# Altium PCB main.PcbDoc (part 1 of 2)
Units mm, origin at the board's own origin, x right, y up, seen from the top; angles counter-clockwise.
Board outline 50 x 70 mm, 6 copper layers (Layer 1 SIG, Layer 2 GND, Layer 3 SIG PWR, Layer 4 SIG PWR, Layer 5 GND, Layer 6 SIG), stack 1.546 mm thick; 153 components, 145 nets, 599 pads, 426 vias.
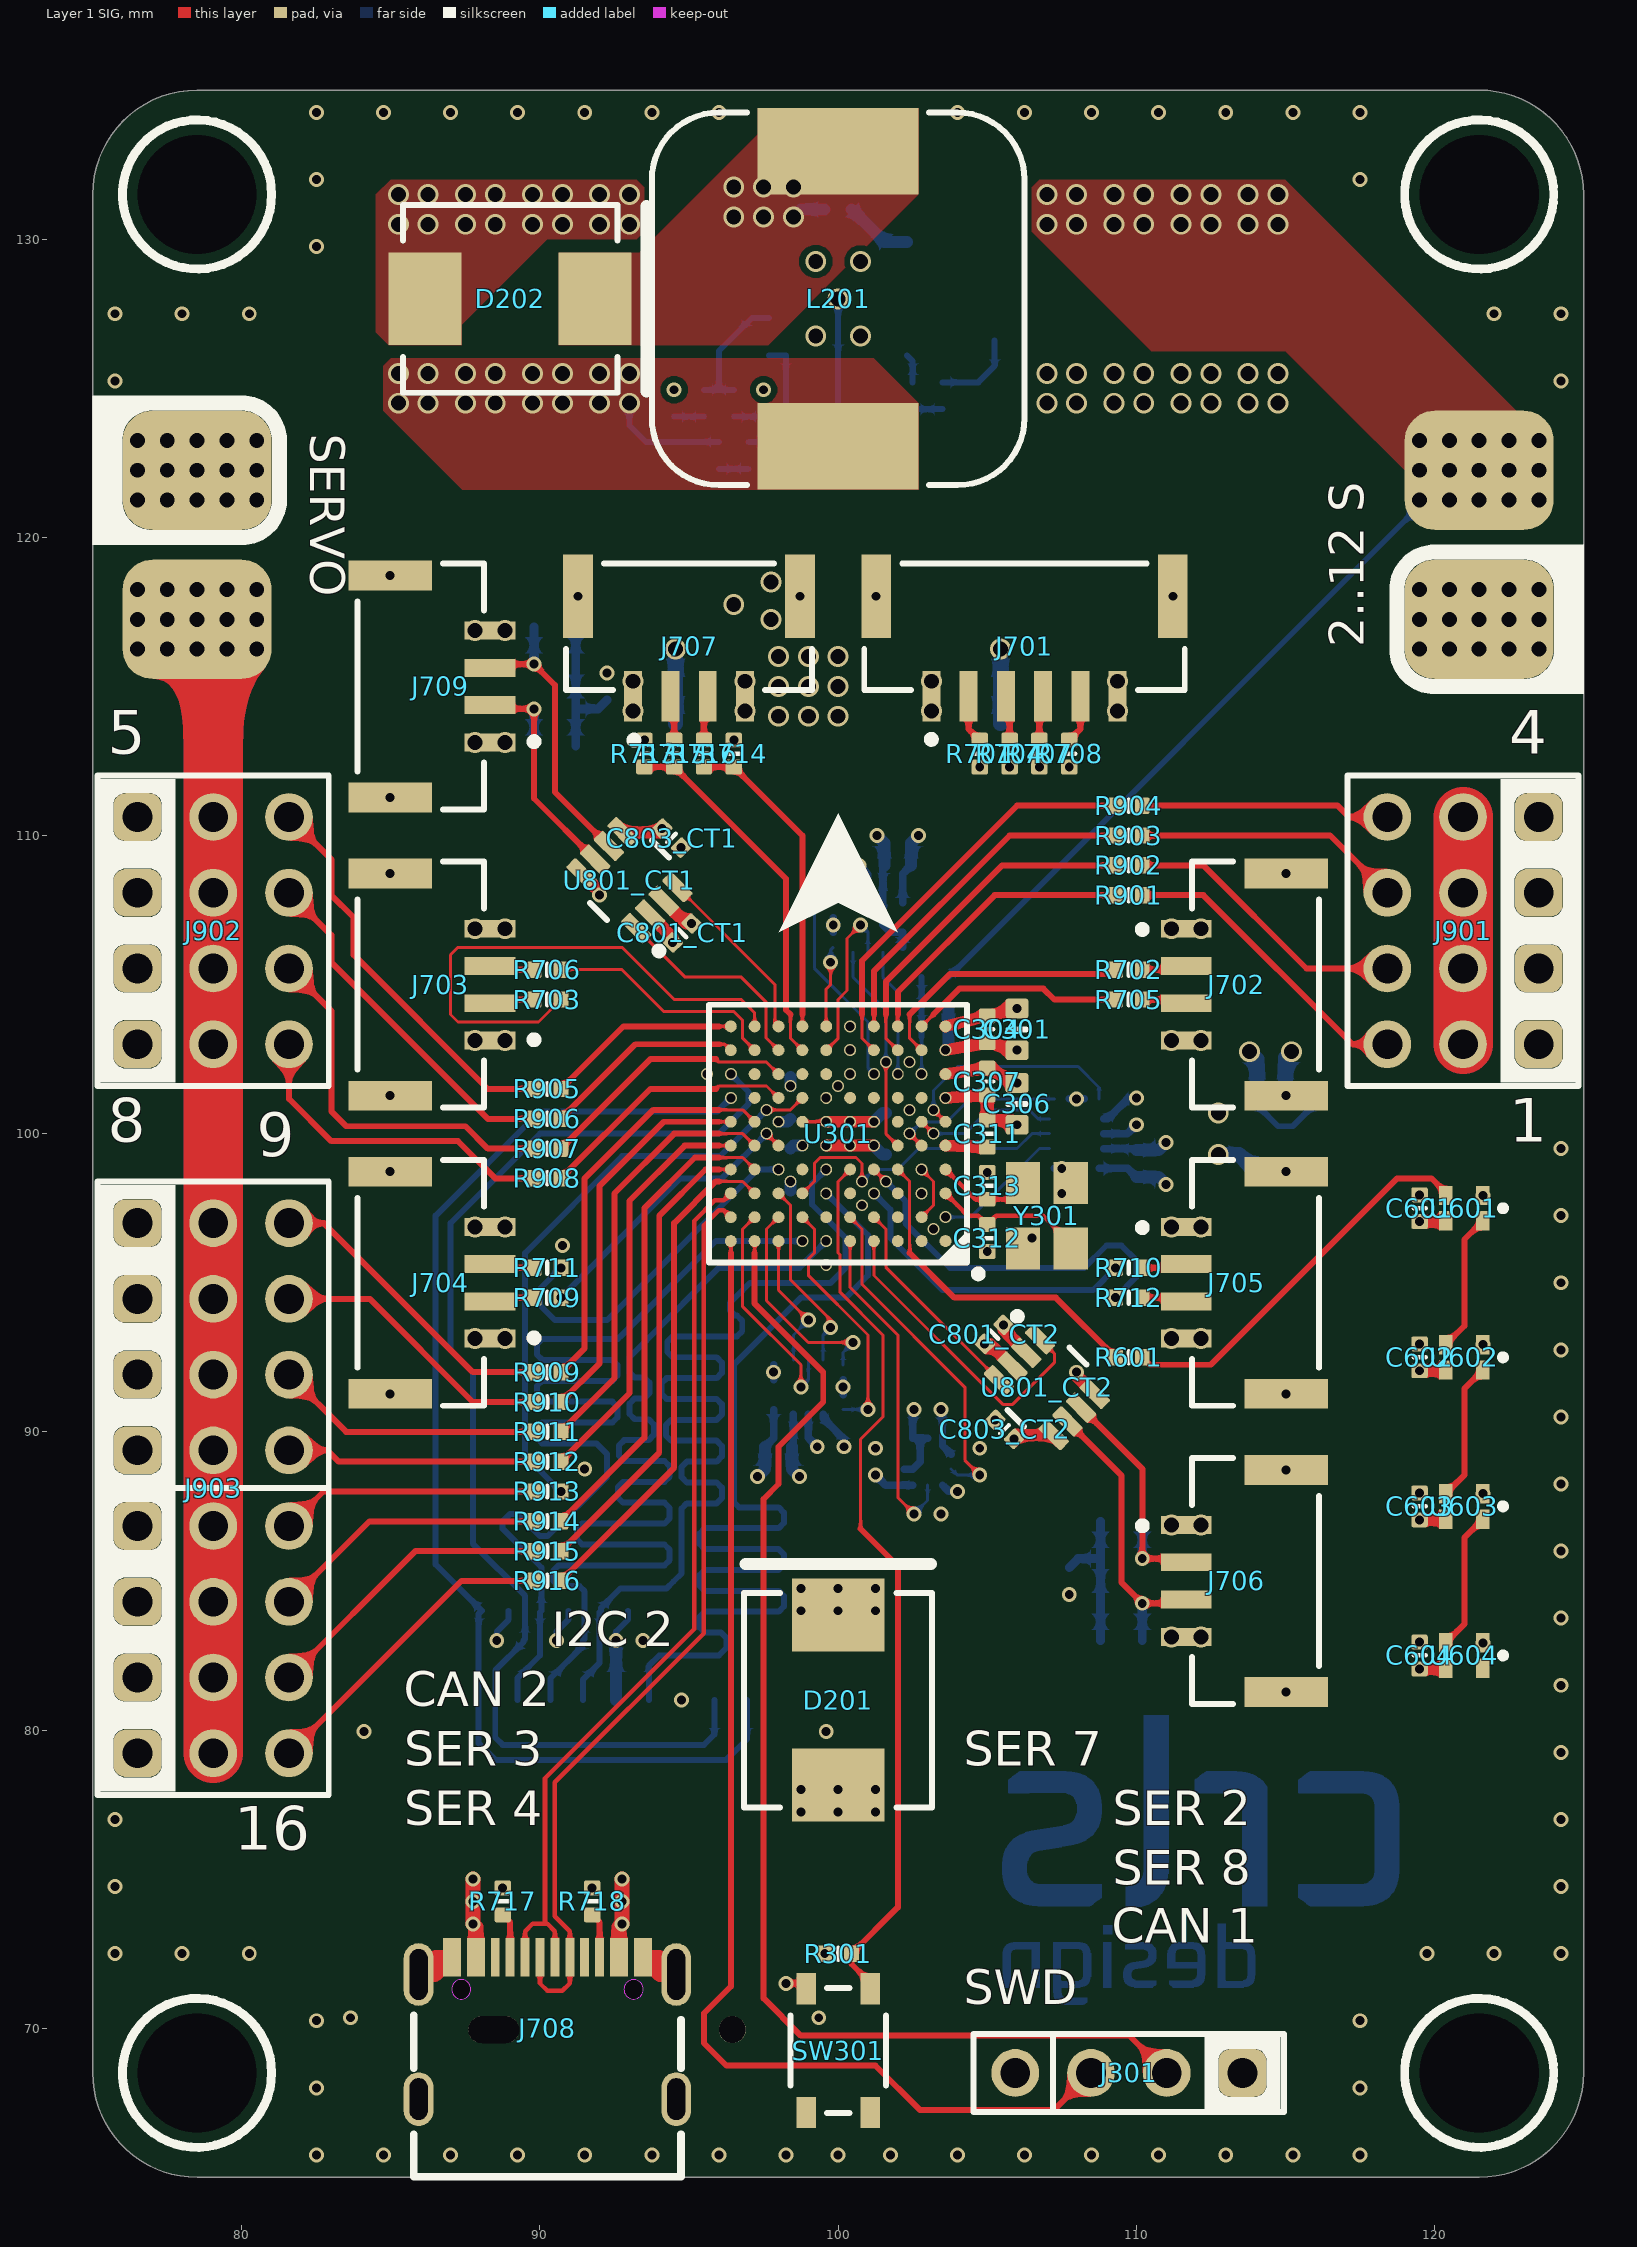
[diagram p0: Layer 1 SIG view]
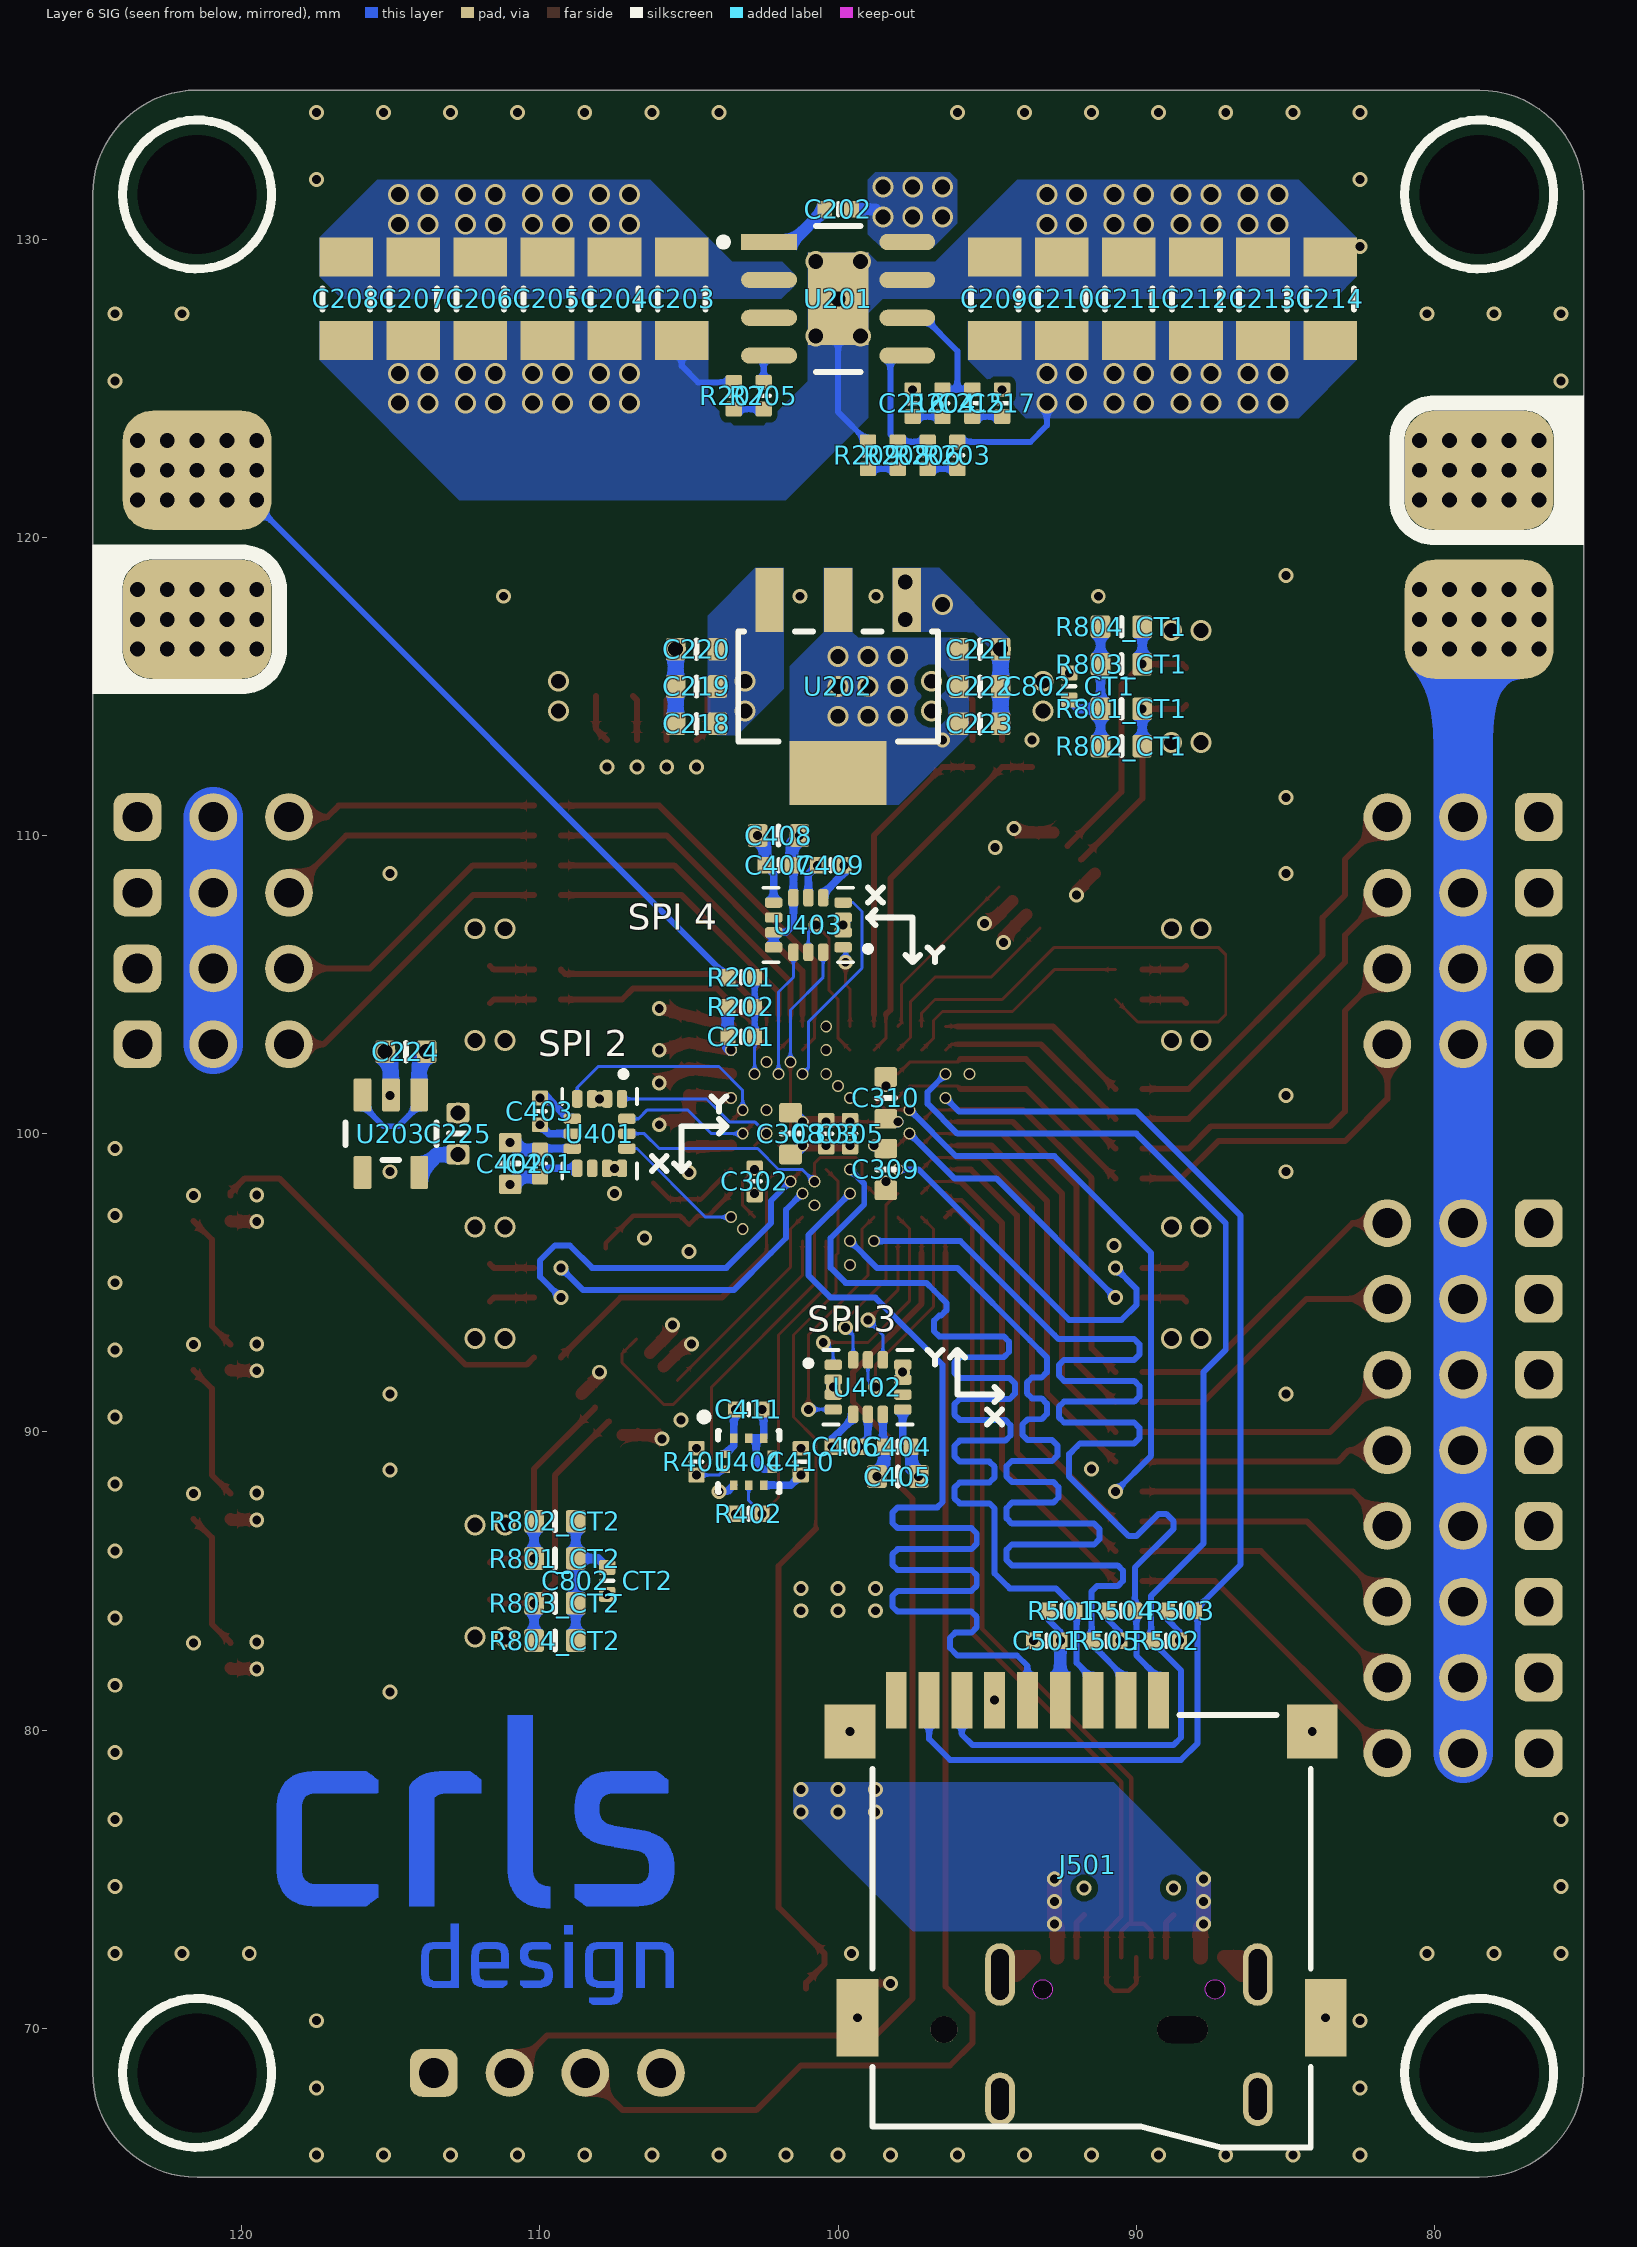
[diagram p1: Layer 6 SIG view, seen from below]
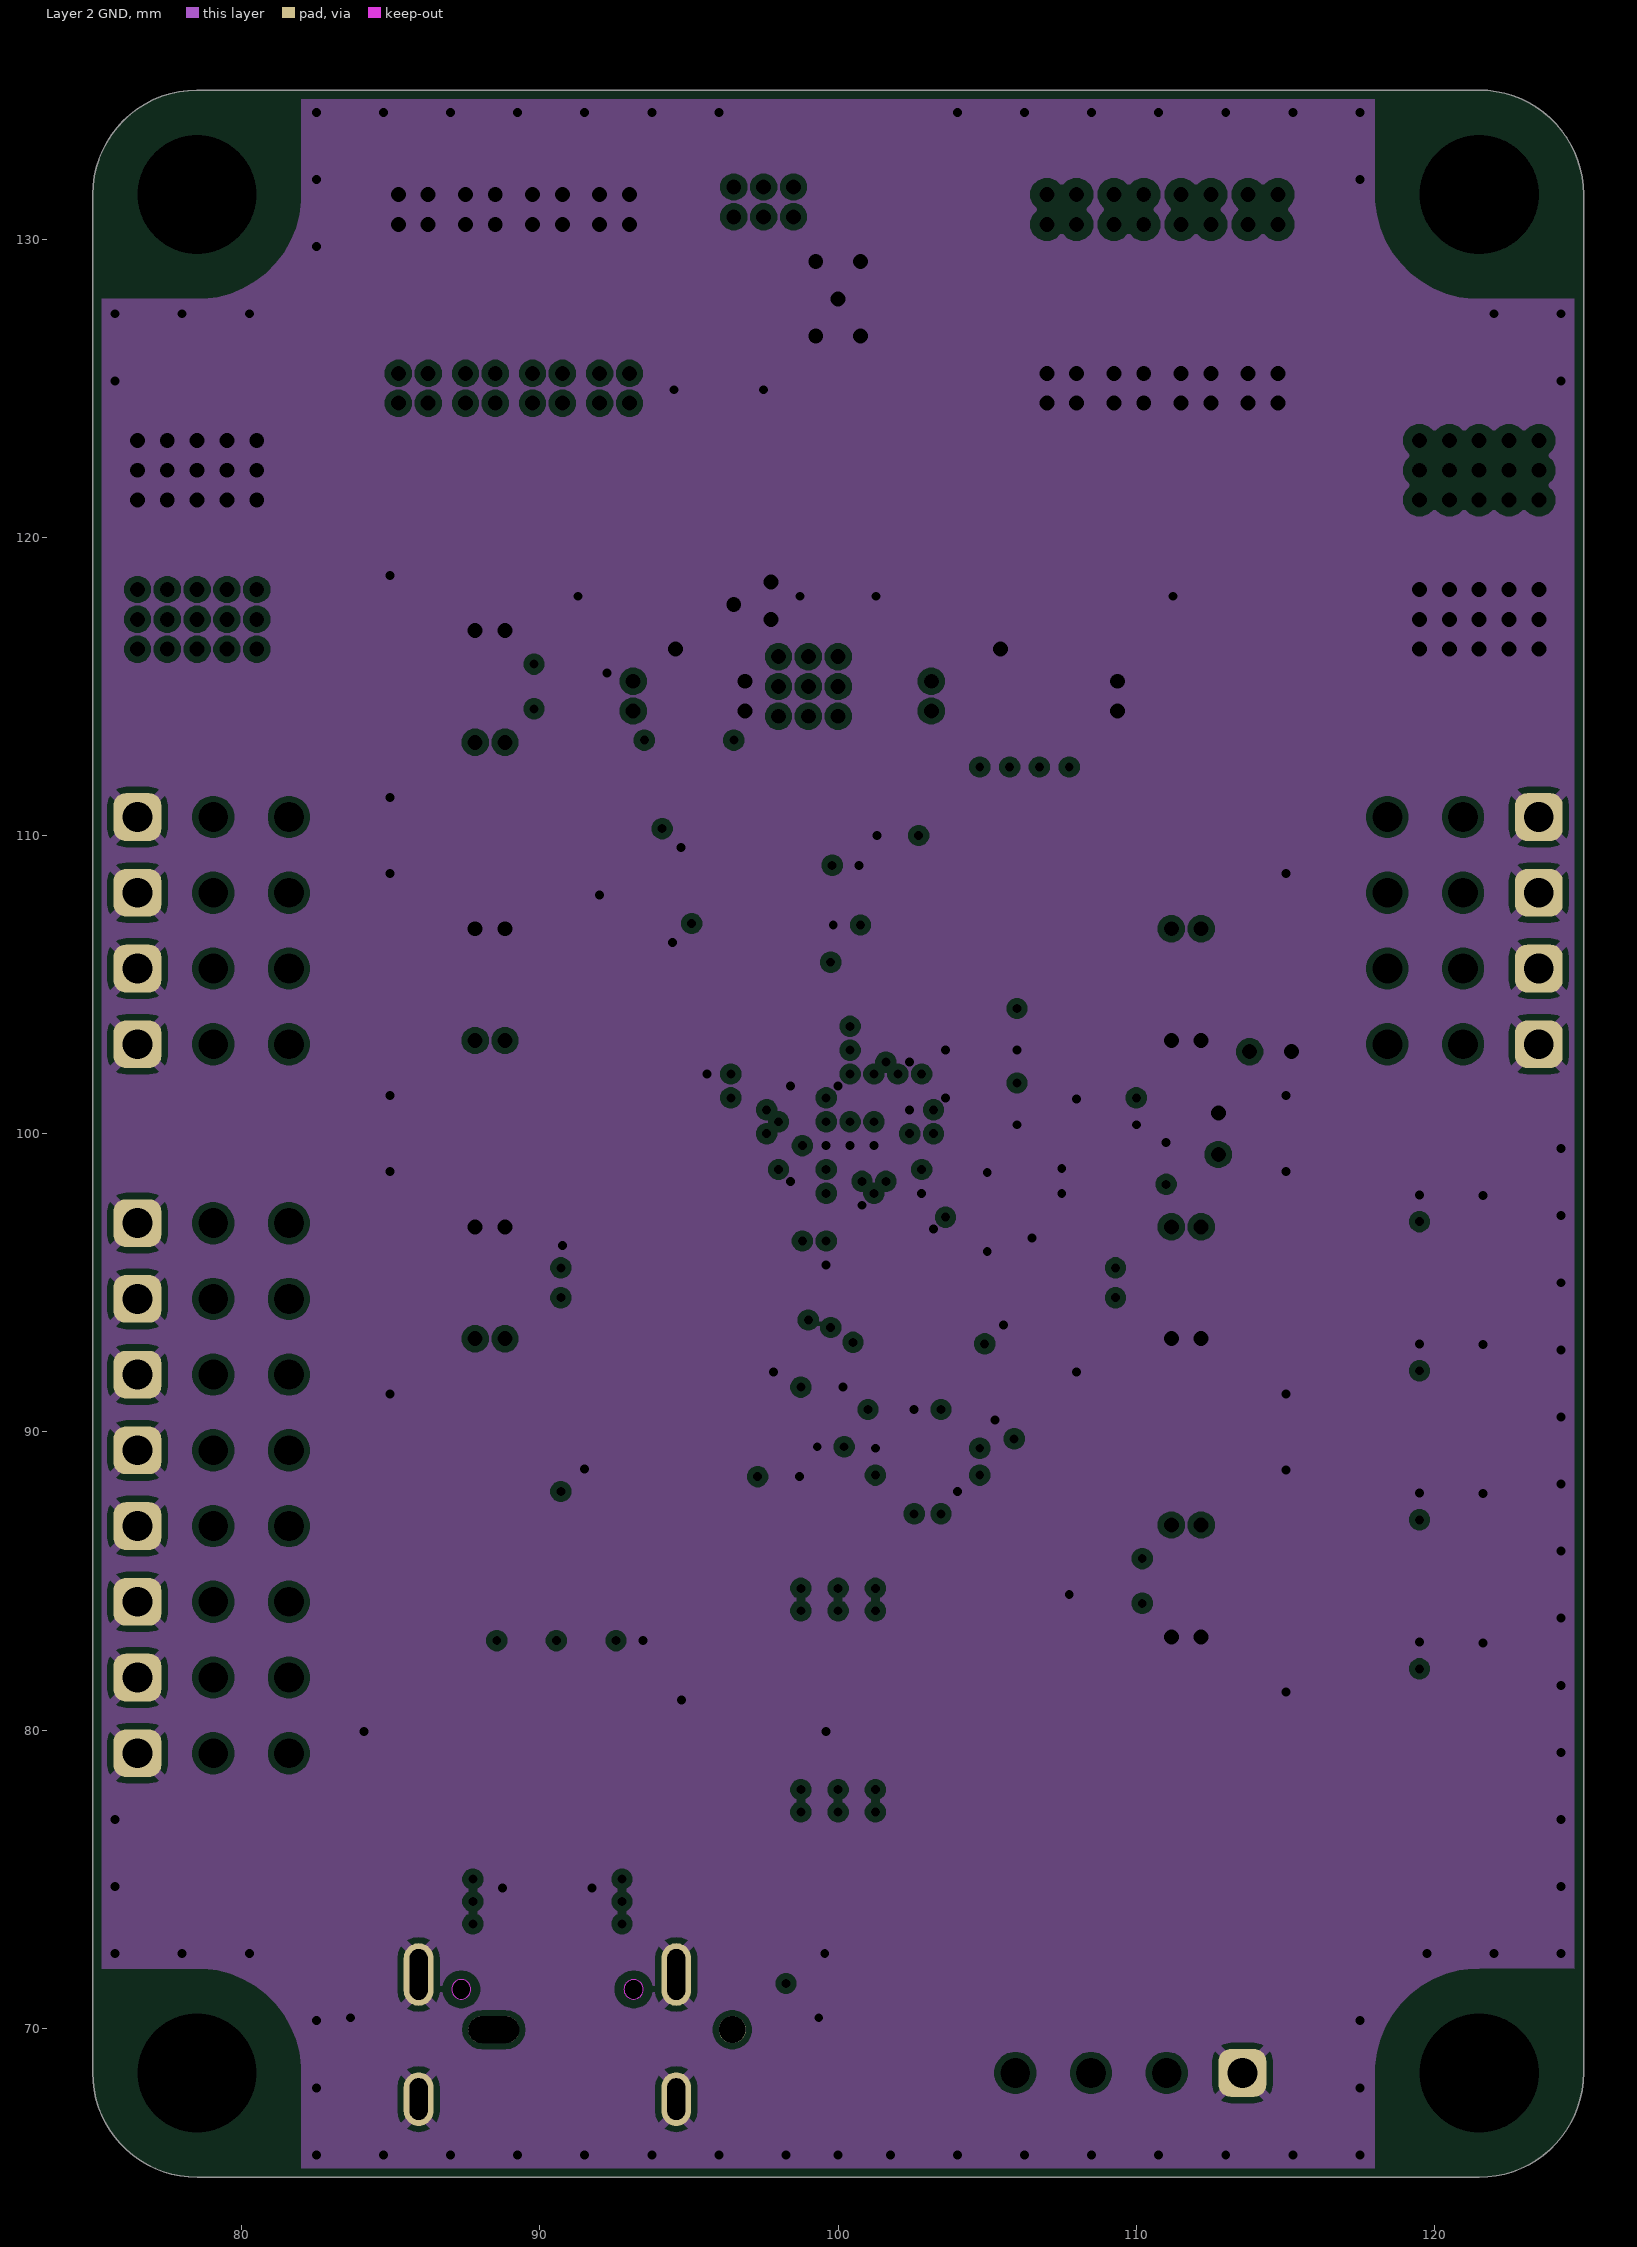
[diagram p2: Layer 2 GND]
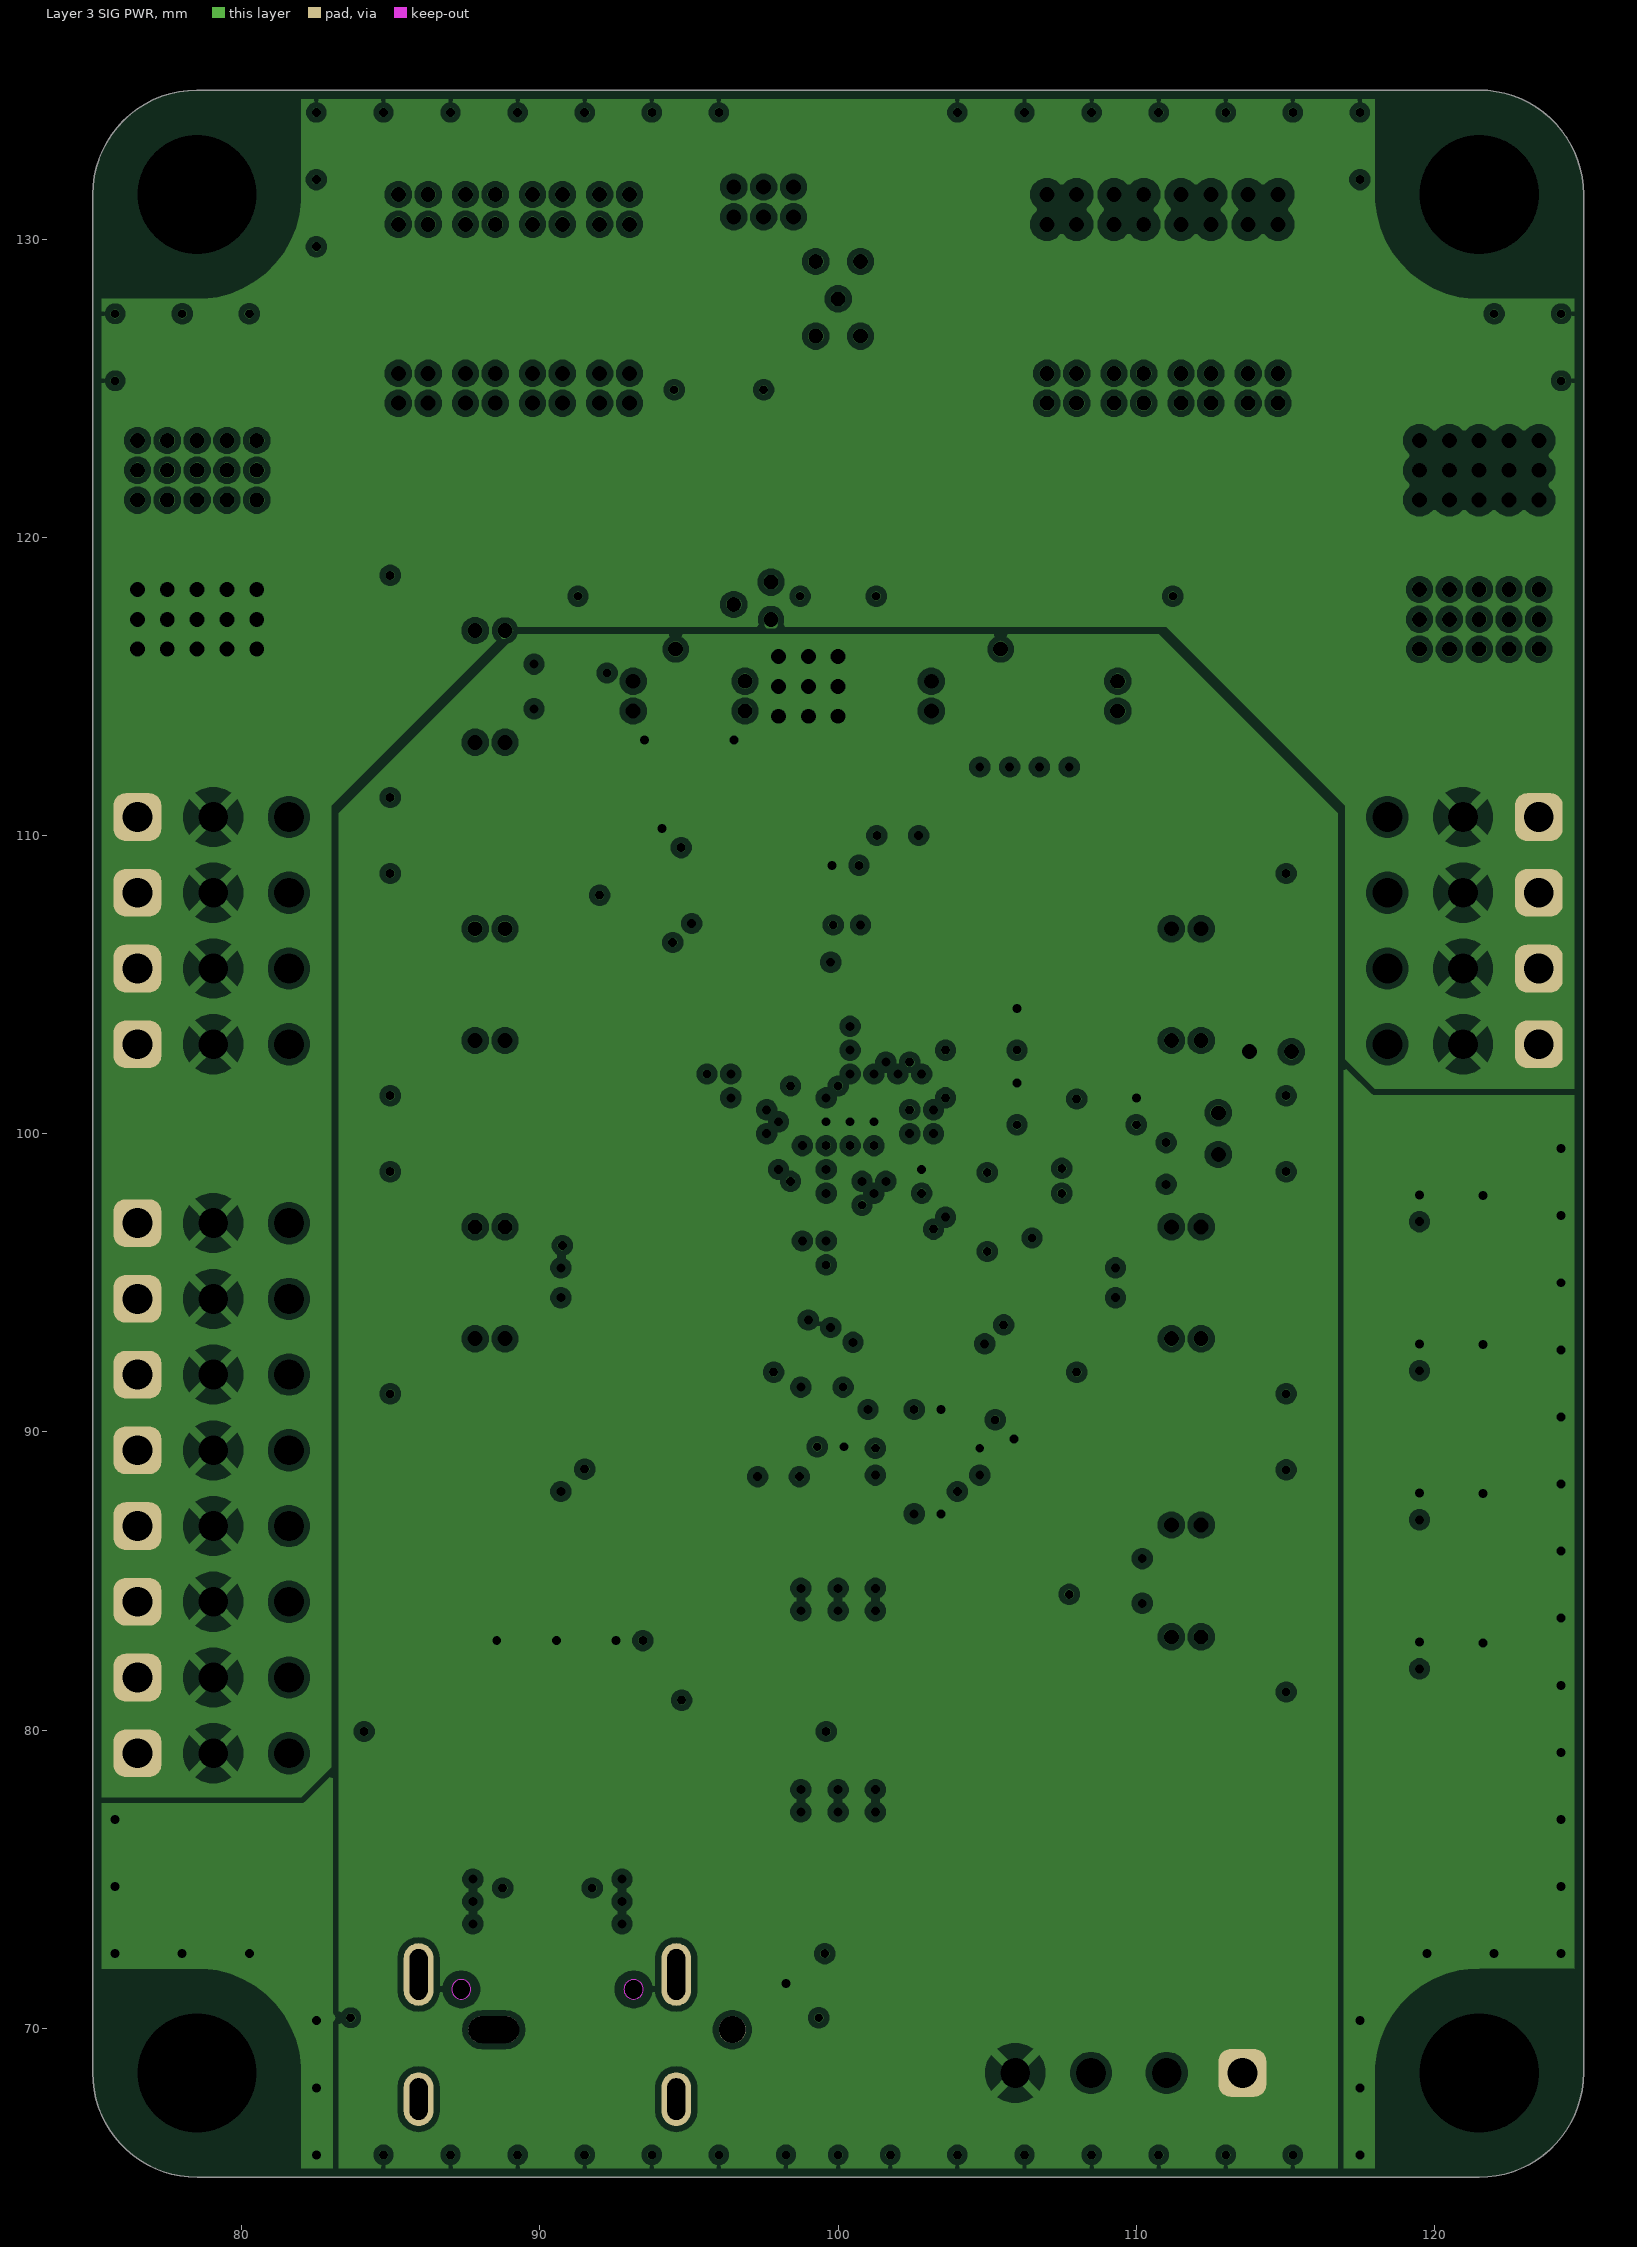
[diagram p3: Layer 3 SIG PWR]
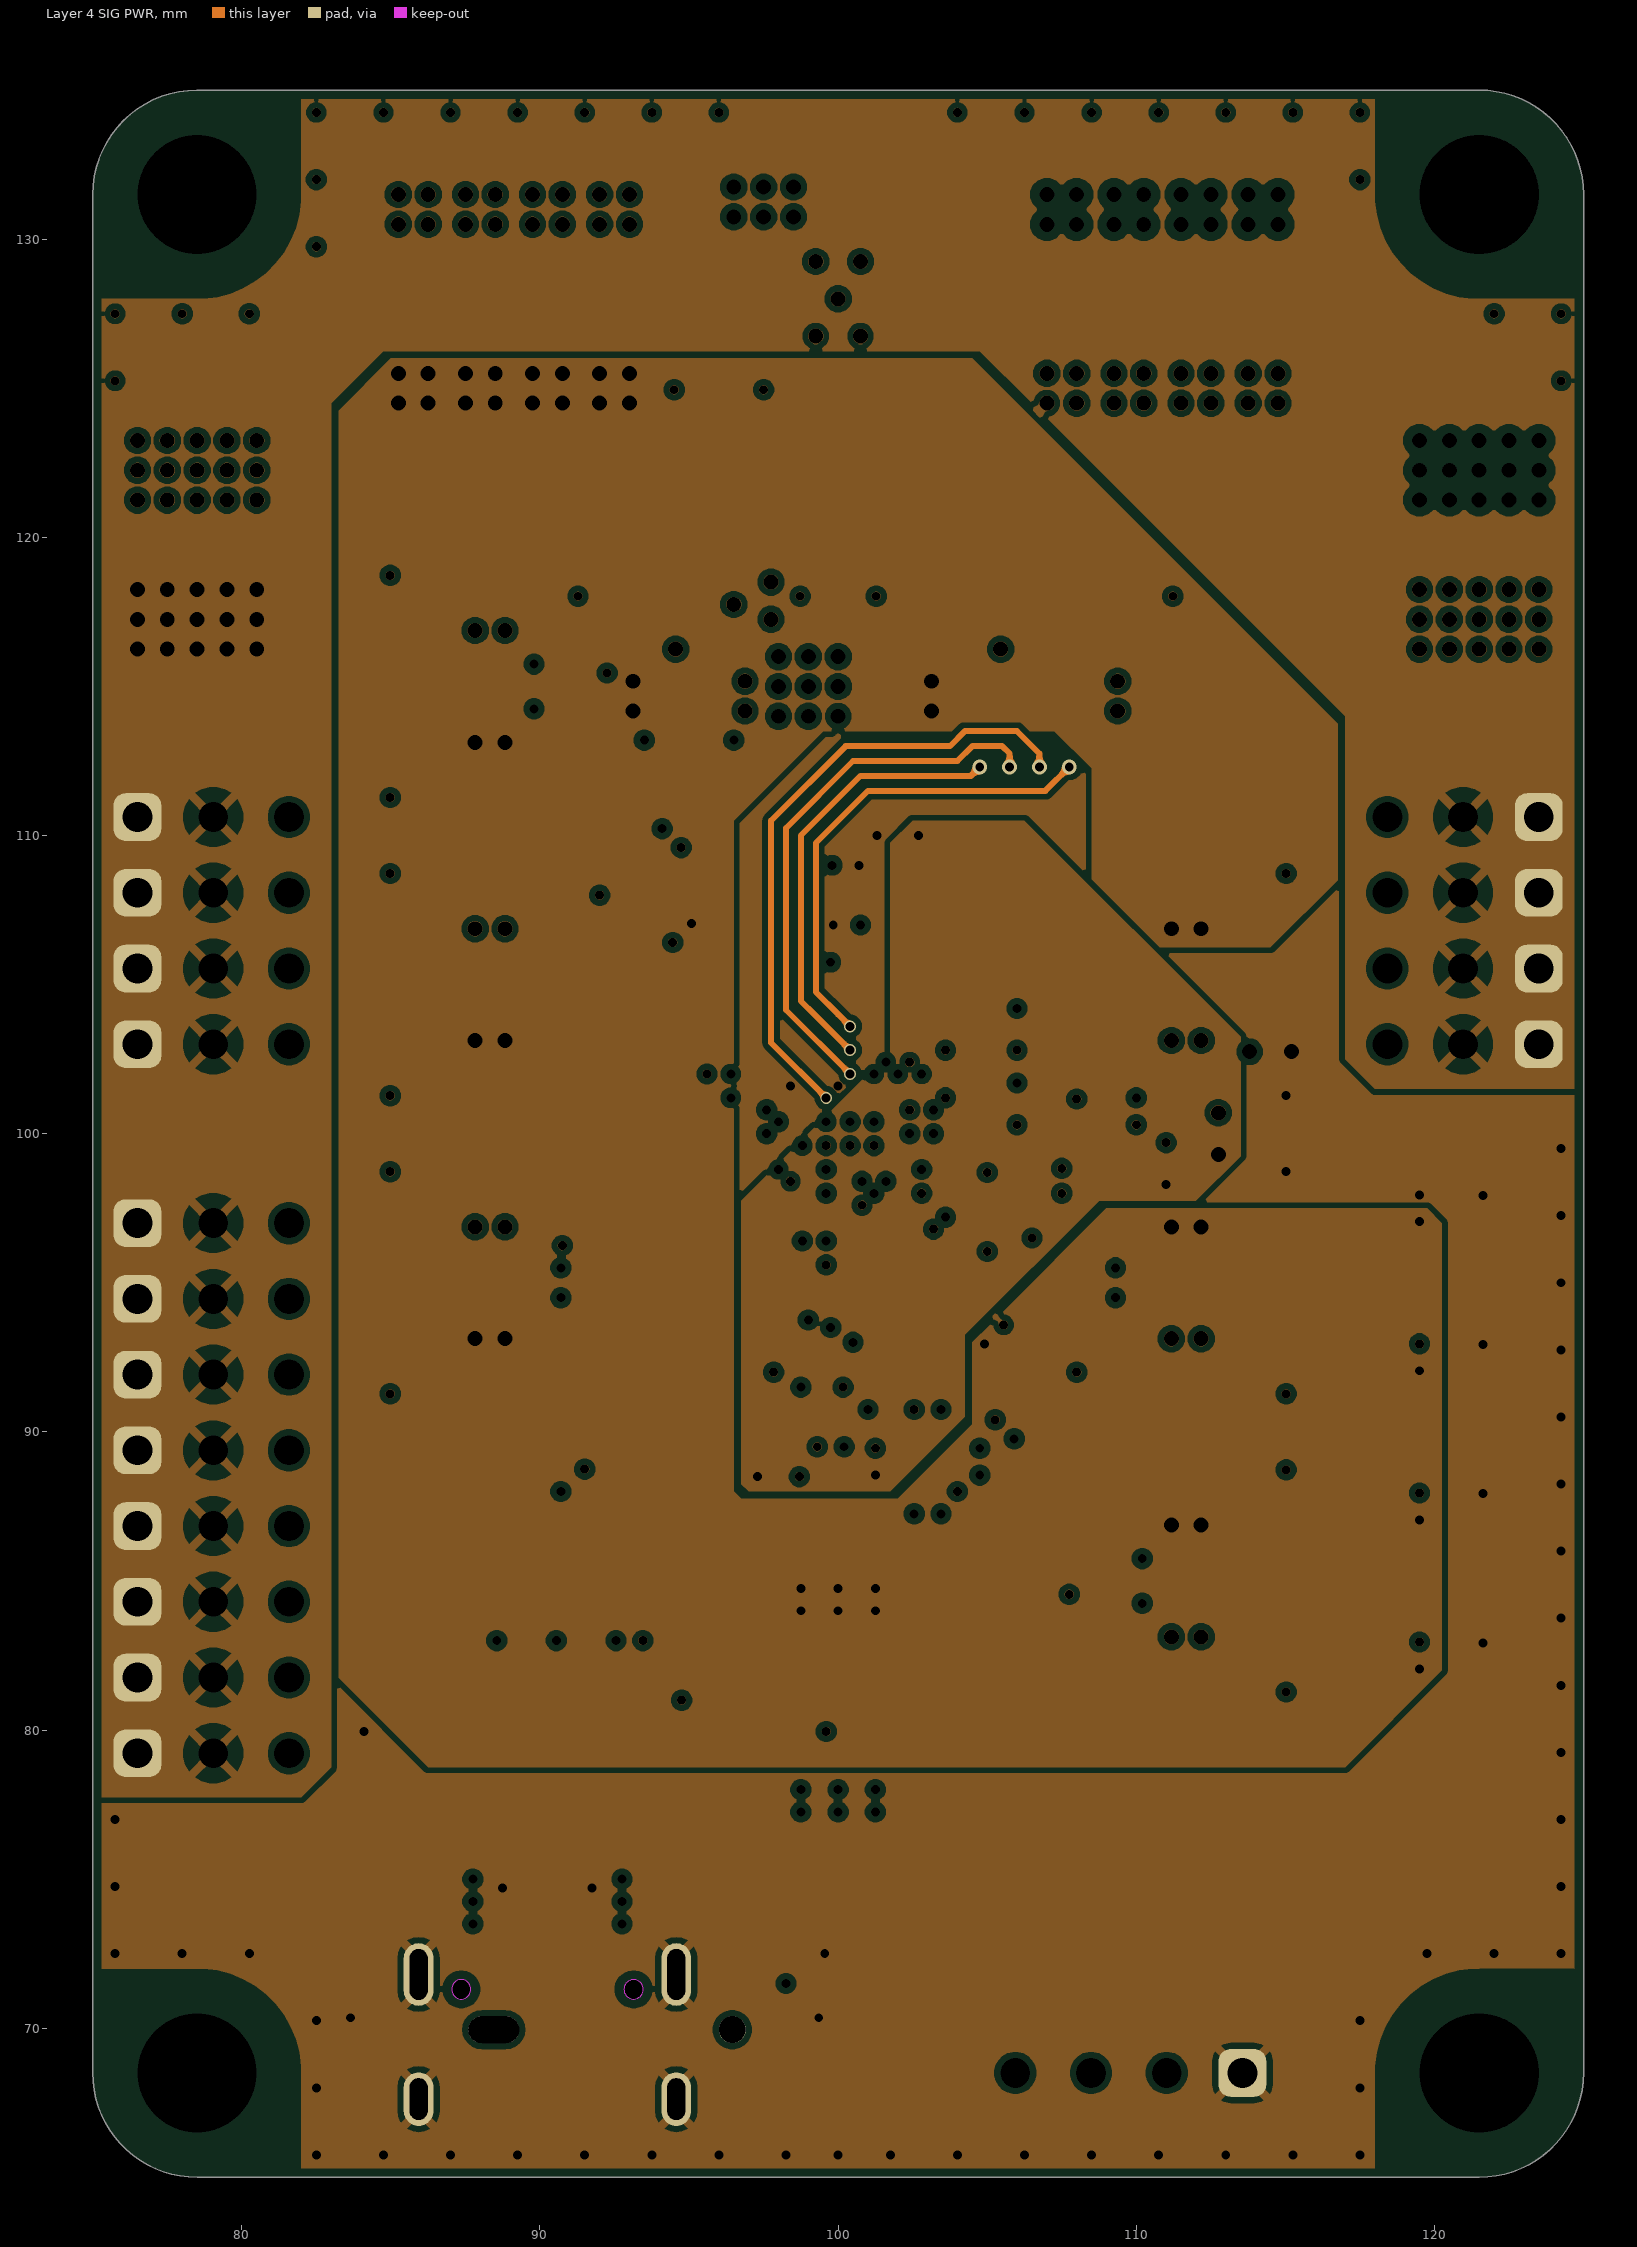
[diagram p4: Layer 4 SIG PWR]
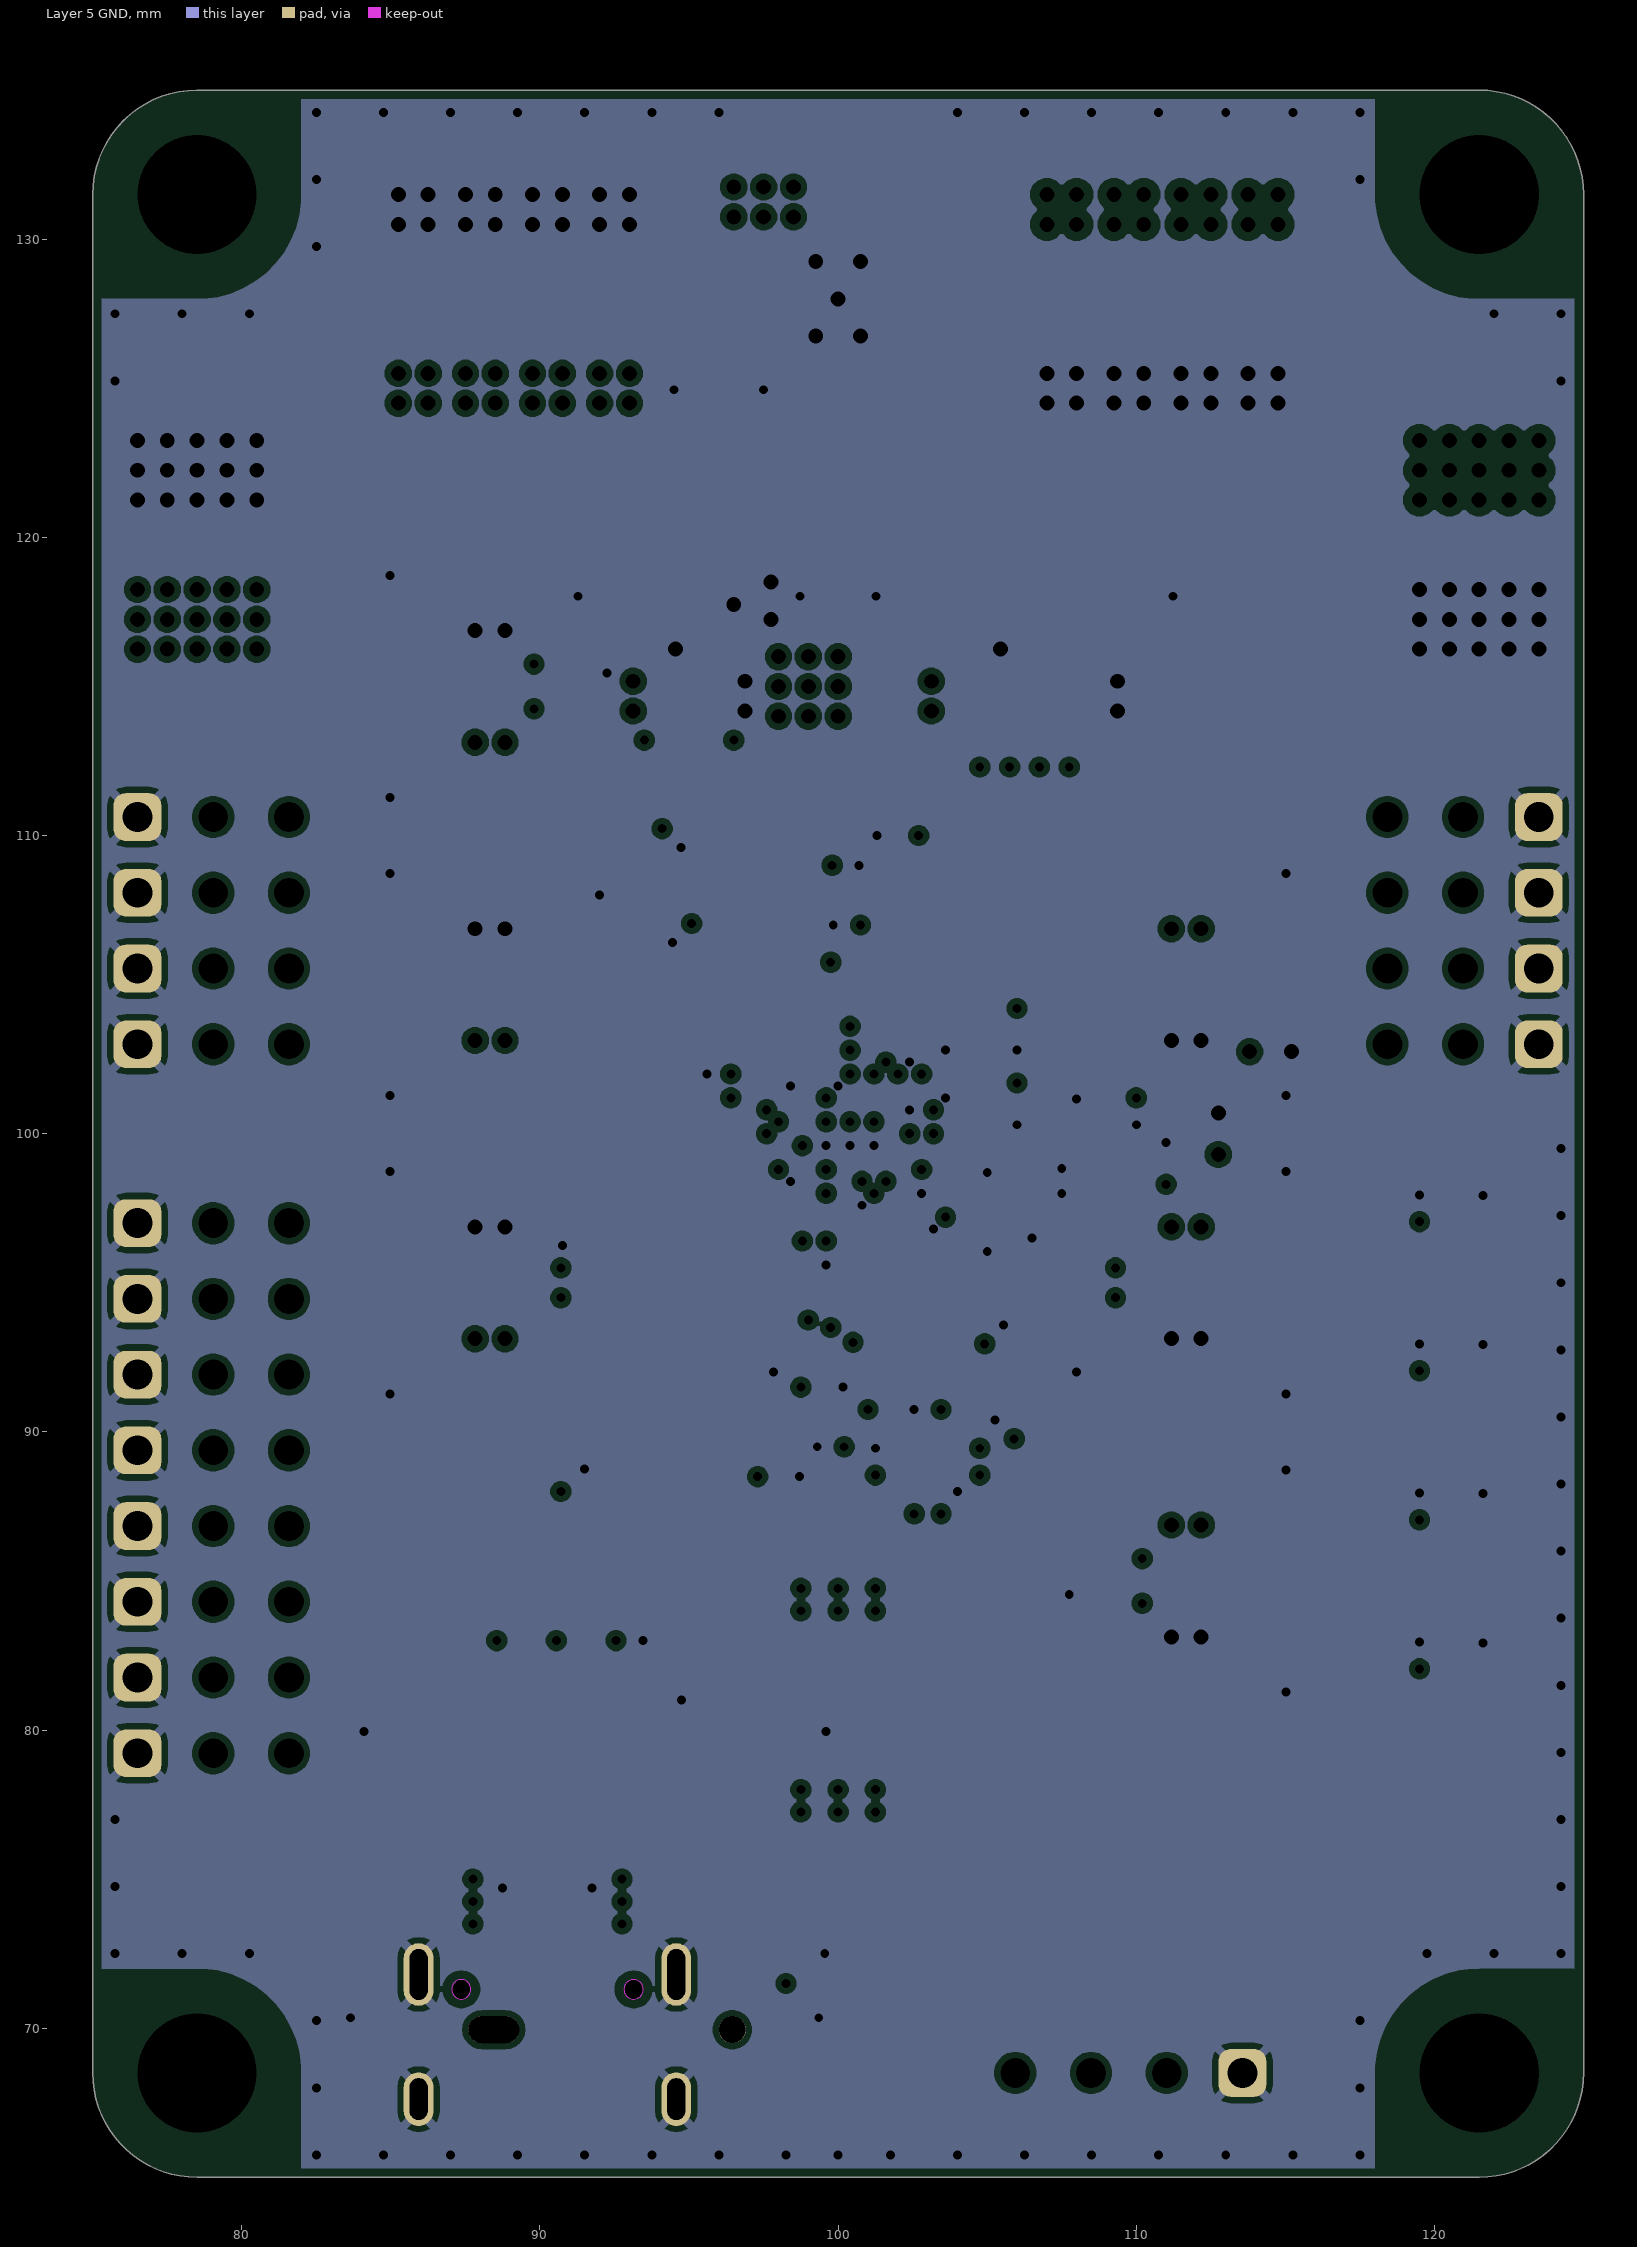
[diagram p5: Layer 5 GND]
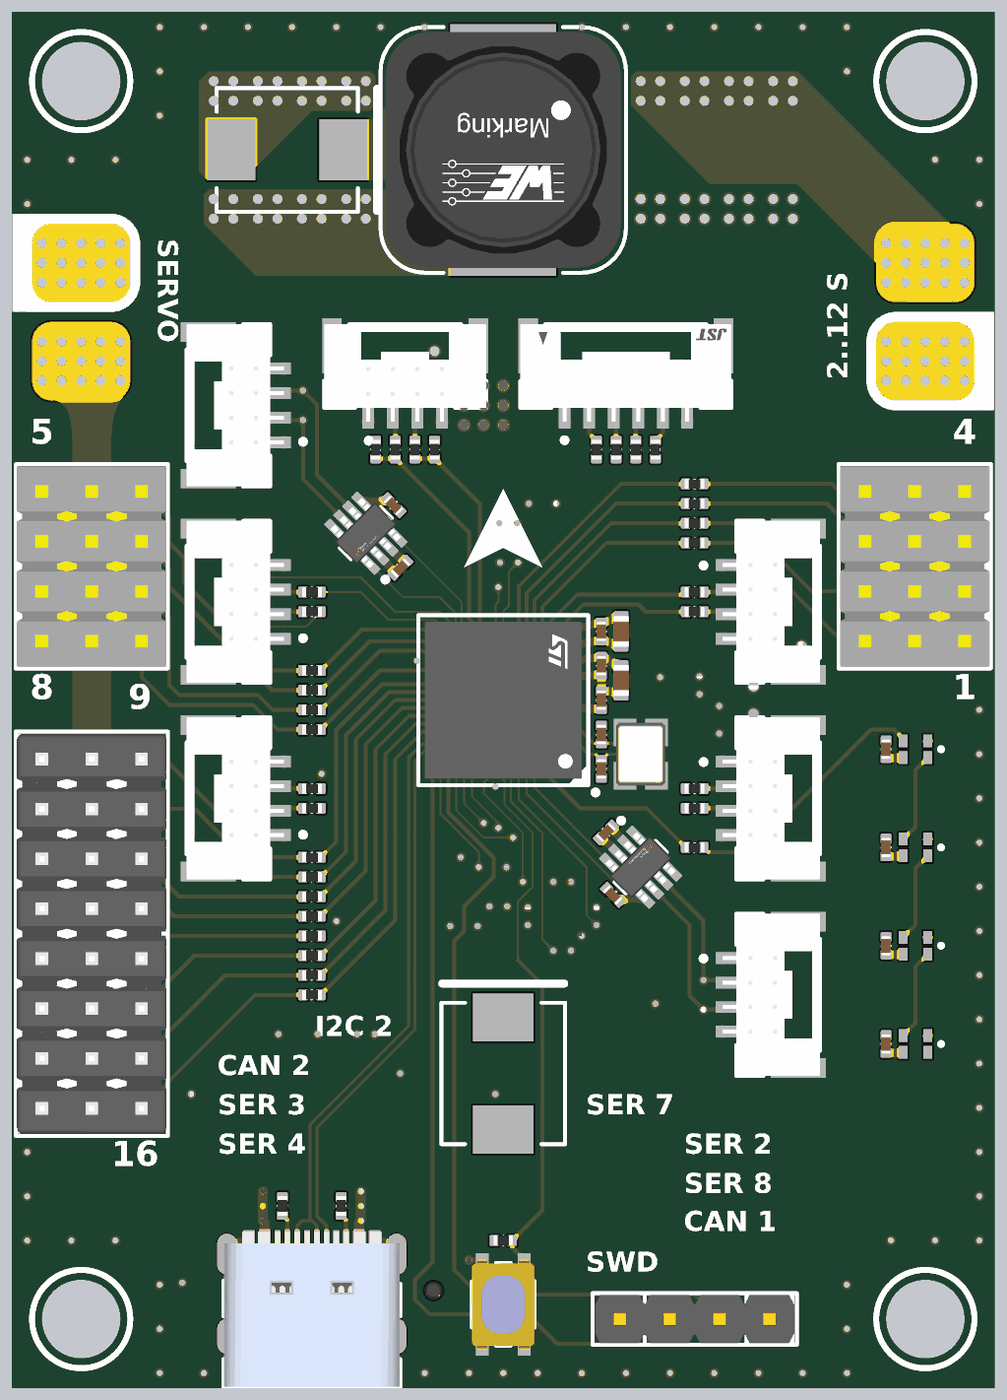
[diagram p7: 3D render of the assembled board from above, using the file's embedded part models]
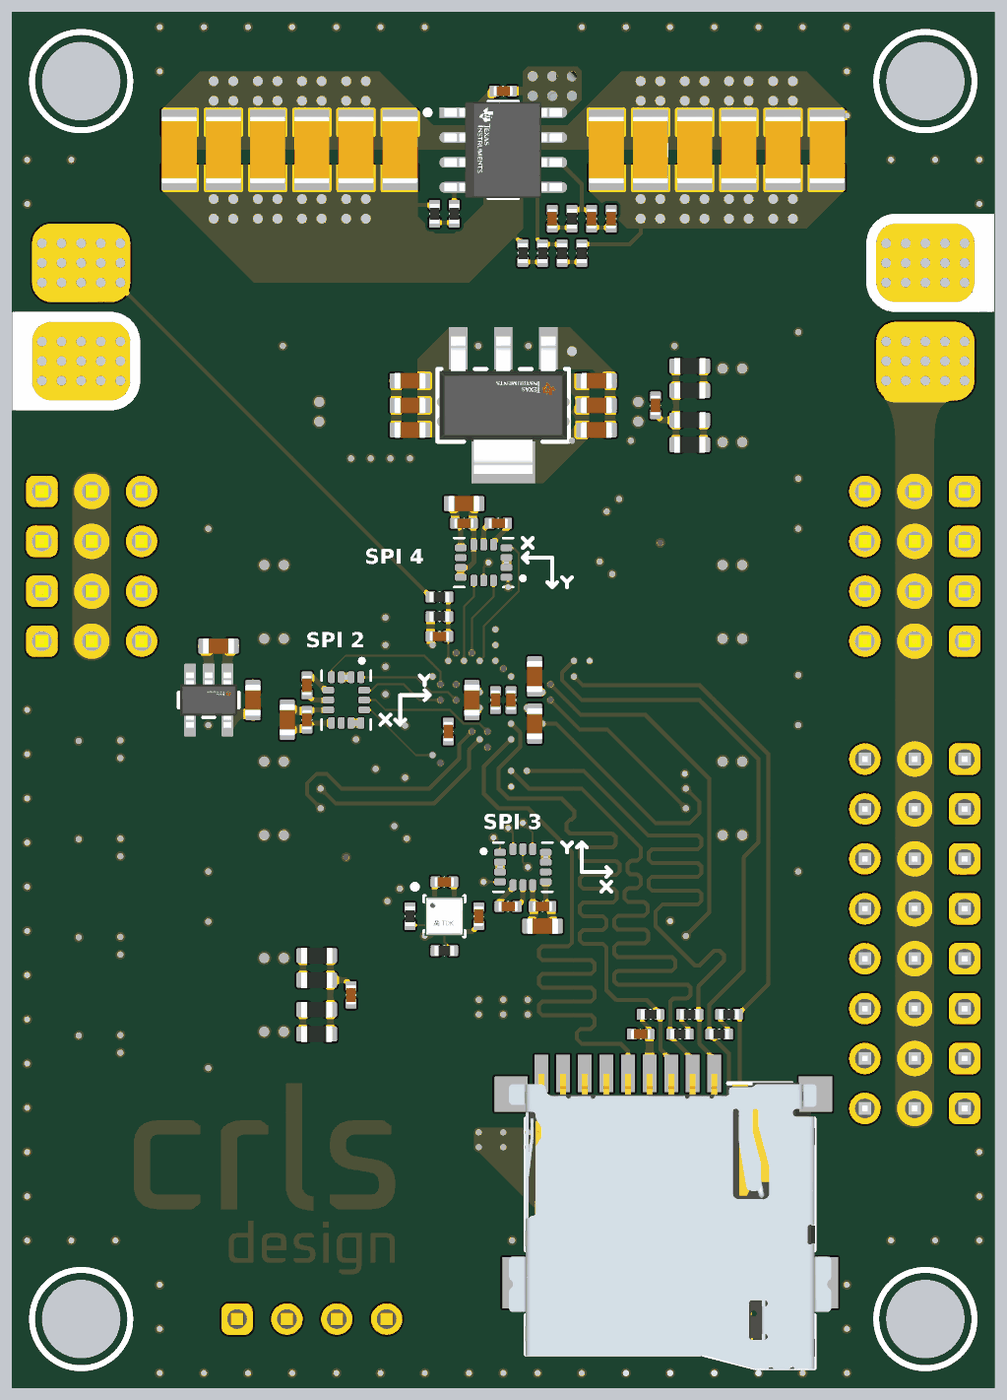
[diagram p8: 3D render of the assembled board from below, using the file's embedded part models]

## Layer stack, top to bottom
Top Solder: solder mask 0.0102, Solder Resist, Dk 3.5
Layer 1 SIG: signal copper 0.035
Prepreg 1: prepreg 0.0994, PP-006, Dk 4.1
Layer 2 GND: signal copper 0.0152
Core 1: prepreg 0.55, PP-006, Dk 4.6
Layer 3 SIG PWR: signal copper 0.0152
Prepreg 2: dielectric 0.1164, FR-4, Dk 4.16
Layer 4 SIG PWR: signal copper 0.0152
Core 2: prepreg 0.55, PP-006, Dk 4.6
Layer 5 GND: signal copper 0.0152
Prepreg 3: prepreg 0.0994, PP-006, Dk 4.1
Layer 6 SIG: signal copper 0.035
Bottom Solder: solder mask 0.0102, Solder Resist, Dk 3.5

## Board outline
75,68.5 75,131.5 cw(c78.5,131.5) 78.5,135 121.5,135 cw(c121.5,131.5) 125,131.5 125,68.5 cw(c121.5,68.5) 121.5,65 78.5,65 cw(c78.5,68.5)

## Design rules (kind name [scope] priority, off if disabled: settings)
BoardOutlineClearance SilkBoardOutlineClearance [OnLayer('Top Overlay', 'Bottom Overlay')] p1: gap=0 ignorepadtopadclearanceinfootprint=FALSE
BoardOutlineClearance [All] p2: gap=0.3 ignorepadtopadclearanceinfootprint=FALSE
Clearance BattClearance [InNet('+BATT')] p1: gap=0.3 ignorepadtopadclearanceinfootprint=TRUE
Clearance DiffPairClearance [All] p2: gap=0.2 ignorepadtopadclearanceinfootprint=TRUE except(0.15: Arc-Arc Arc-Track Arc-SMDPad Track-Track Track-SMDPad)
Clearance BGAClearance [WithinRoom('BGARoomDefinition')] p3: gap=0.2 ignorepadtopadclearanceinfootprint=TRUE except(0.1: Arc-Arc Arc-Track Arc-SMDPad Arc-THPad Arc-Via Arc-Fill Arc-Poly Arc-Region Arc-Text Track-Track Track-SMDPad Track-THPad Track-Via Track-Fill Track-Poly Track-Region Track-Text SMDPad-Via Via-Via; 0.15: SMDPad-Fill SMDPad-Poly SMDPad-Region THPad-Fill THPad-Poly THPad-Region Via-Fill Via-Poly Via-Region)
Clearance [All] p4: gap=0.2 ignorepadtopadclearanceinfootprint=TRUE except(0.15: SMDPad-SMDPad SMDPad-Via SMDPad-Fill SMDPad-Poly SMDPad-Region)
DiffPairsRouting USBDiffPairsRouting [InDifferentialPair('USB.D')] p1: maxlimit=0.254 minlimit=0.18 mostfreqgap=0.254 toplayer_maxgap=0.18 toplayer_prefgap=0.18 toplayer_minwidth=0.152 toplayer_maxwidth=0.152 toplayer_prefwidth=0.152 bottomlayer_maxgap=0.18 bottomlayer_prefgap=0.18 bottomlayer_minwidth=0.152 bottomlayer_maxwidth=0.152 bottomlayer_prefwidth=0.152 impedanceprofiledriven=TRUE impedanceprofileid={0232211A-56B8-4145-8F62-5247B36A0E2D} impedanceprofilevalue=90.000000 maxuncoupledlength=12.7
HoleSize [All] p1: absolutevalues=TRUE maxlimit=5 minlimit=0.3 maxpercent=80.000 minpercent=20.000
MatchedLengths USBMatchedLengths [InDifferentialPair('USB.D')] p1: tolerance=25.4 checknetsindiffpair=TRUE checkdiffpairvsdiffpair=FALSE checkxsignals=FALSE checkothers=FALSE usedelayunits=TRUE delaytolerance=20.000000
MatchedLengths SPIMatchedLengths [InNetClass('SPI_LINES')] p2: tolerance=25.4 checknetsindiffpair=FALSE checkdiffpairvsdiffpair=TRUE checkxsignals=TRUE checkothers=TRUE usedelayunits=TRUE delaytolerance=100.000000
MatchedLengths SDMatchedLengths [InNetClass('SD_LINES')] p3: tolerance=25.4 checknetsindiffpair=FALSE checkdiffpairvsdiffpair=TRUE checkxsignals=TRUE checkothers=TRUE usedelayunits=TRUE delaytolerance=25.000000
MinimumSolderMaskSliver [All] p1: minsoldermaskwidth=0.04
PolygonConnect HeaderPolygonConnect [InComponent('J*')] p1: connectstyle=Relief reliefconductorwidth=0.3 reliefentries=4 polygonreliefangle="45 Angle" airgapwidth=0.2
PolygonConnect TopBotGNDPolygonConnect [(InNet('GND') AND OnLayer('Top Layer', 'Bottom Layer'))] p2: connectstyle=Relief reliefconductorwidth=0.3 reliefentries=4 polygonreliefangle="45 Angle" airgapwidth=0.2
PolygonConnect [All] p3: connectstyle=Direct reliefconductorwidth=0.254 reliefentries=4 polygonreliefangle="90 Angle" airgapwidth=0.254
RoomDefinition BGARoomDefinition [False] p1: confinementstyle=ConfineIn formatcopy=TRUE lockcomponents=FALSE outline 96,96 104,96 104,104 96,104
RoutingVias BGARoutingVias [WithinRoom('BGARoomDefinition')] p1: holewidth=0.3 width=0.4 viastyle="Through Hole" minholewidth=0.3 minwidth=0.4 maxholewidth=0.3 maxwidth=0.4
RoutingVias [All] p2: holewidth=0.3 width=0.5 viastyle="Through Hole" minholewidth=0.3 minwidth=0.5 maxholewidth=1 maxwidth=2
SilkToSilkClearance [All] p1: silktosilkclearance=0
SilkToSolderMaskClearance [IsPad] p1: minsilkscreentomaskgap=0 clearancetoexposedcopper=TRUE
SolderMaskExpansion [All] p1: expansion=0.102 istentingtop=FALSE
SupplyNets "Schematic Supply Nets_7" [InNet('+1.8 LDO')] p1: voltage=0.000
SupplyNets "Schematic Supply Nets_6" [InNet('+5 SERVO')] p2: voltage=0.000
SupplyNets "Schematic Supply Nets_4" [InNet('+BATT')] p3: voltage=0.000
SupplyNets "Schematic Supply Nets_3" [InNet('+5 USB')] p4: voltage=0.000
SupplyNets "Schematic Supply Nets_2" [InNet('+3.3 LDO')] p5: voltage=0.000
SupplyNets "Schematic Supply Nets_1" [InNet('+5 BUCK')] p6: voltage=0.000
SupplyNets "Schematic Supply Nets" [InNet('GND')] p7: voltage=0.000
Width BGAWidth [WithinRoom('BGARoomDefinition')] p1: maxlimit=0.4 minlimit=0.1 preferedwidth=0.1
Width [All] p2: maxlimit=2 minlimit=0.1 preferedwidth=0.15
25 further rules are at their usual default settings.

## Classes and differential pairs
channel class "8 can transceiver": CT1 CT2
component class LED: C601 C602 C603 C604 R601 U601 U602 U603 U604
net class SPI_LINES: IMU1_SPI2.CS IMU1_SPI2.INT IMU1_SPI2.MISO IMU1_SPI2.MOSI IMU1_SPI2.SCK IMU2_SPI3.CS IMU2_SPI3.INT IMU2_SPI3.MISO IMU2_SPI3.MOSI IMU2_SPI3.SCK IMU3_SPI4.CS IMU3_SPI4.INT IMU3_SPI4.MISO IMU3_SPI4.MOSI IMU3_SPI4.SCK
net class SD_LINES: TF.CK TF.CMD TF.D0 TF.D1 TF.D2 TF.D3
component class SD: C501 J501 R501 R502 R503 R504 R505
component class PWR: C201 C202 C203 C204 C205 C206 C207 C208 C209 C210 C211 C212 C213 C214 C215 C216 C217 C218 C219 C220 C221 C222 C223 C224 C225 D201 D202 L201 R201 R202 R203 R204 R205 R206 R207 R208 R209 U201 U202 U203
component class PWM: J901 J902 J903 R901 R902 R903 R904 R905 R906 R907 R908 R909 R910 R911 R912 R913 R914 R915 R916
component class SN: C401 C402 C403 C404 C405 C406 C407 C408 C409 C410 C411 R401 R402 U401 U402 U403 U404
component class CT2: C801_CT2 C802_CT2 C803_CT2 R801_CT2 R802_CT2 R803_CT2 R804_CT2 U801_CT2
component class CT1: C801_CT1 C802_CT1 C803_CT1 R801_CT1 R802_CT1 R803_CT1 R804_CT1 U801_CT1
component class CON: J701 J702 J703 J704 J705 J706 J707 J708 J709 R701 R702 R703 R704 R705 R706 R707 R708 R709 R710 R711 R712 R713 R714 R715 R716 R717 R718
component class mcu: C301 C302 C303 C304 C305 C306 C307 C308 C309 C310 C311 C312 C313 J301 R301 SW301 U301 Y301
differential pair USB.D: +USB.D_P -USB.D_N
differential pair CAN_CT2: +CAN_CT1_H -CAN_CT1_L
differential pair CAN_CT1: +CAN_CT2_H -CAN_CT2_L

## Components (designator, comment, footprint, x,y, rotation, side; value= is the part's Value field where it differs from the comment)
C201 "Capacitors,0402,100n,16V" CAPC0402(1005)60_L 103.25,103.25 r0 bottom value=100n
C202 "Capacitors,0402,100n,16V" CAPC0402(1005)60_L 100,131 r180 bottom value=100n
C203 "Capacitors,1206,4.7u,100V" CAPC3216X180X50NL20T25 105.25,128 r270 bottom value=4.7u
C204 "Capacitors,1206,4.7u,100V" CAPC3216X180X50NL20T25 107.5,128 r270 bottom value=4.7u
C205 "Capacitors,1206,4.7u,100V" CAPC3216X180X50NL20T25 109.75,128 r270 bottom value=4.7u
C206 "Capacitors,1206,4.7u,100V" CAPC3216X180X50NL20T25 112,128 r270 bottom value=4.7u
C207 "Capacitors,1206,4.7u,100V" CAPC3216X180X50NL20T25 114.25,128 r270 bottom value=4.7u
C208 "Capacitors,1206,4.7u,100V" CAPC3216X180X50NL20T25 116.5,128 r270 bottom value=4.7u
C209 "Capacitors,1206,47u,25V" CAPC3216X180X50NL20T25 94.75,128 r90 bottom value=47u
C210 "Capacitors,1206,47u,25V" CAPC3216X180X50NL20T25 92.5,128 r90 bottom value=47u
C211 "Capacitors,1206,47u,25V" CAPC3216X180X50NL20T25 90.25,128 r90 bottom value=47u
C212 "Capacitors,1206,47u,25V" CAPC3216X180X50NL20T25 88,128 r90 bottom value=47u
C213 "Capacitors,1206,47u,25V" CAPC3216X180X50NL20T25 85.75,128 r90 bottom value=47u
C214 "Capacitors,1206,47u,25V" CAPC3216X180X50NL20T25 83.5,128 r90 bottom value=47u
C215 "Capacitors,0402,12p" CAPC0402(1005)60_L 95.5,124.5 r270 bottom value=12p
C216 "Capacitors,0402,10n" CAPC0402(1005)60_L 97.5,124.5 r90 bottom value=10n
C217 "Capacitors,0402,12p" CAPC0402(1005)60_L 94.5,124.5 r90 bottom value=12p
C218 "Capacitors,0603,4.7u,16V" CAPC0603(1608)100_L 104.75,113.75 r0 bottom value=4.7u
C219 "Capacitors,0603,4.7u,16V" CAPC0603(1608)100_L 104.75,115 r0 bottom value=4.7u
C220 "Capacitors,0603,4.7u,16V" CAPC0603(1608)100_L 104.75,116.25 r0 bottom value=4.7u
C221 "Capacitors,0603,4.7u,16V" CAPC0603(1608)100_L 95.25,116.25 r180 bottom value=4.7u
C222 "Capacitors,0603,4.7u,16V" CAPC0603(1608)100_L 95.25,115 r180 bottom value=4.7u
C223 "Capacitors,0603,4.7u,16V" CAPC0603(1608)100_L 95.25,113.75 r180 bottom value=4.7u
C224 "Capacitors,0603,4.7u,16V" CAPC0603(1608)100_L 114.5,102.75 r0 bottom value=4.7u
C225 "Capacitors,0603,4.7u,16V" CAPC0603(1608)100_L 112.75,100 r90 bottom value=4.7u
C301 "Capacitors,0603,4.7u,16V" CAPC0603(1608)100_L 106,103.5 r270 top value=4.7u
C302 "Capacitors,0402,100n,16V" CAPC0402(1005)60_L 102.8,98.4 r270 bottom value=100n
C303 "Capacitors,0402,100n,16V" CAPC0402(1005)60_L 100.4,100 r270 bottom value=100n
C304 "Capacitors,0402,100n,16V" CAPC0402(1005)60_L 105,103.5 r270 top value=100n
C305 "Capacitors,0402,100n,16V" CAPC0402(1005)60_L 99.6,100 r270 bottom value=100n
C306 "Capacitors,0603,4.7u,16V" CAPC0603(1608)100_L 106,101 r270 top value=4.7u
C307 "Capacitors,0402,100n,16V" CAPC0402(1005)60_L 105,101.75 r270 top value=100n
C308 "Capacitors,0603,4.7u,16V" CAPC0603(1608)100_L 101.6,100 r270 bottom value=4.7u
C309 "Capacitors,0603,4.7u,16V" CAPC0603(1608)100_L 98.4,98.8 r270 bottom value=4.7u
C310 "Capacitors,0603,4.7u,16V" CAPC0603(1608)100_L 98.4,101.2 r90 bottom value=4.7u
C311 "Capacitors,0402,100n,16V" CAPC0402(1005)60_L 105,100 r90 top value=100n
C312 "Capacitors,0402,12p" CAPC0402(1005)60_L 105,96.5 r270 top value=12p
C313 "Capacitors,0402,12p" CAPC0402(1005)60_L 105,98.25 r90 top value=12p
C401 "Capacitors,0402,100n,16V" CAPC0402(1005)60_L 110,99 r90 bottom value=100n
C402 "Capacitors,0603,4.7u,16V" CAPC0603(1608)100_L 111,99 r90 bottom value=4.7u
C403 "Capacitors,0402,100n,16V" CAPC0402(1005)60_L 110,100.75 r270 bottom value=100n
C404 "Capacitors,0402,100n,16V" CAPC0402(1005)60_L 98,89.5 r0 bottom value=100n
C405 "Capacitors,0603,4.7u,16V" CAPC0603(1608)100_L 98,88.5 r0 bottom value=4.7u
C406 "Capacitors,0402,100n,16V" CAPC0402(1005)60_L 99.75,89.5 r180 bottom value=100n
C407 "Capacitors,0402,100n,16V" CAPC0402(1005)60_L 102,109 r180 bottom value=100n
C408 "Capacitors,0603,4.7u,16V" CAPC0603(1608)100_L 102,110 r180 bottom value=4.7u
C409 "Capacitors,0402,100n,16V" CAPC0402(1005)60_L 100.25,109 r0 bottom value=100n
C410 "Capacitors,0402,100n,16V" CAPC0402(1005)60_L 101.25,89 r90 bottom value=100n
C411 "Capacitors,0402,100n,16V" CAPC0402(1005)60_L 103,90.75 r180 bottom value=100n
C501 "Capacitors,0402,100n,16V" CAPC0402(1005)60_L 93,83 r0 bottom value=100n
C601 "Capacitors,0402,100n,16V" CAPC0402(1005)60_L 119.5,97.5 r90 top value=100n
C602 "Capacitors,0402,100n,16V" CAPC0402(1005)60_L 119.5,92.5 r90 top value=100n
C603 "Capacitors,0402,100n,16V" CAPC0402(1005)60_L 119.5,87.5 r90 top value=100n
C604 "Capacitors,0402,100n,16V" CAPC0402(1005)60_L 119.5,82.5 r90 top value=100n
C801_CT1 "Capacitors,0402,100n,16V" CAPC0402(1005)60_L 94.768,106.732 r225 top value=100n (schematic designator C801)
C801_CT2 "Capacitors,0402,100n,16V" CAPC0402(1005)60_L 105.232,93.268 r45 top value=100n (schematic designator C801)
C802_CT1 "Capacitors,0402,100n,16V" CAPC0402(1005)60_L 92.25,115 r90 bottom value=100n (schematic designator C802)
C802_CT2 "Capacitors,0402,100n,16V" CAPC0402(1005)60_L 107.75,85 r270 bottom value=100n (schematic designator C802)
C803_CT1 "Capacitors,0402,100n,16V" CAPC0402(1005)60_L 94.414,109.914 r315 top value=100n (schematic designator C803)
C803_CT2 "Capacitors,0402,100n,16V" CAPC0402(1005)60_L 105.586,90.086 r135 top value=100n (schematic designator C803)
D201 "B560C-13-F" DIOD-B5X0C-2_N 100,81 r270 top
D202 "B560C-13-F" DIOD-B5X0C-2_N 89,128 r180 top
J301 "MTLW-104-05-G-S-185" FP-MTLW-104-05-G-S-185-MFG 109.75,68.5 r180 top
J501 "693071020811" 693071020811 91.5,73.25 r180 bottom
J701 "BM06B-GHS-TBT(LF)(SN)" FP-BM06B-GHS-TBT_LF_SN-MFG 106.25,117 r0 top
J702 "BM04B-GHS-TBT(LF)(SN)" FP-BM04B-GHS-TBT_LF_SN-MFG 114,105 r90 top
J703 "BM04B-GHS-TBT(LF)(SN)" FP-BM04B-GHS-TBT_LF_SN-MFG 86,105 r270 top
J704 "BM04B-GHS-TBT(LF)(SN)" FP-BM04B-GHS-TBT_LF_SN-MFG 86,95 r270 top
J705 "BM04B-GHS-TBT(LF)(SN)" FP-BM04B-GHS-TBT_LF_SN-MFG 114,95 r90 top
J706 "BM04B-GHS-TBT(LF)(SN)" FP-BM04B-GHS-TBT_LF_SN-MFG 114,85 r90 top
J707 "BM04B-GHS-TBT(LF)(SN)" FP-BM04B-GHS-TBT_LF_SN-MFG 95,117 r180 top
J708 "USB-TYPE-C-019" USB-TYPE-C-12+4P 90.25,70 r0 top
J709 "BM04B-GHS-TBT(LF)(SN)" FP-BM04B-GHS-TBT_LF_SN-MFG 86,115 r270 top
J901 "TSW-104-07-G-T" FP-TSW-104-07-G-T-MFG 120.96,106.81 r90 top
J902 "TSW-104-07-G-T" FP-TSW-104-07-G-T-MFG 79.04,106.81 r270 top
J903 "TSW-108-25-T-T" FP-TSW-108-25-T-T-MFG 79.04,88.11 r270 top
L201 "7447709100" WE-PD_1210 100,128 r180 top
R201 "Resistors,0402,1%,100k" RESC0402(1005)_L 103.25,105.25 r180 bottom value=100k
R202 "Resistors,0402,1%,5.1k" RESC0402(1005)_L 103.25,104.25 r0 bottom value=5.1k
R203 "Resistors,0402,1%,100k" RESC0402(1005)_L 96,122.75 r270 bottom value=100k
R204 "Resistors,0402,1%,10k" RESC0402(1005)_L 96.5,124.5 r270 bottom value=10k
R205 "Resistors,0402,1%,100k" RESC0402(1005)_L 102.5,124.75 r270 bottom value=100k
R206 "Resistors,0402,1%,10k" RESC0402(1005)_L 97,122.75 r90 bottom value=10k
R207 "Resistors,0402,1%,100k" RESC0402(1005)_L 103.5,124.75 r90 bottom value=100k
R208 "Resistors,0402,1%,10k" RESC0402(1005)_L 98,122.75 r270 bottom value=10k
R209 "Resistors,0402,1%,10k" RESC0402(1005)_L 99,122.75 r90 bottom value=10k
R301 "Resistors,0402,1%,10k" RESC0402(1005)_L 100,72.5 r180 top value=10k
R401 "Resistors,0402,1%,1.5k" RESC0402(1005)_L 104.75,89 r270 bottom value=1.5k
R402 "Resistors,0402,1%,1.5k" RESC0402(1005)_L 103,87.25 r180 bottom value=1.5k
R501 "Resistors,0402,1%,10k" RESC0402(1005)_L 92.5,84 r180 bottom value=10k
R502 "Resistors,0402,1%,10k" RESC0402(1005)_L 89,83 r0 bottom value=10k
R503 "Resistors,0402,1%,10k" RESC0402(1005)_L 88.5,84 r180 bottom value=10k
R504 "Resistors,0402,1%,10k" RESC0402(1005)_L 90.5,84 r180 bottom value=10k
R505 "Resistors,0402,1%,10k" RESC0402(1005)_L 91,83 r0 bottom value=10k
R601 "Resistors,0402,1%,100" RESC0402(1005)_L 109.75,92.5 r0 top value=100
R701 "Resistors,0402,1%,100" RESC0402(1005)_L 104.75,112.75 r90 top value=100
R702 "Resistors,0402,1%,100" RESC0402(1005)_L 109.75,105.5 r0 top value=100
R703 "Resistors,0402,1%,100" RESC0402(1005)_L 90.25,104.5 r180 top value=100
R704 "Resistors,0402,1%,100" RESC0402(1005)_L 105.75,112.75 r90 top value=100
R705 "Resistors,0402,1%,100" RESC0402(1005)_L 109.75,104.5 r0 top value=100
R706 "Resistors,0402,1%,100" RESC0402(1005)_L 90.25,105.5 r180 top value=100
R707 "Resistors,0402,1%,100" RESC0402(1005)_L 106.75,112.75 r90 top value=100
R708 "Resistors,0402,1%,100" RESC0402(1005)_L 107.75,112.75 r90 top value=100
R709 "Resistors,0402,1%,100" RESC0402(1005)_L 90.25,94.5 r180 top value=100
R710 "Resistors,0402,1%,100" RESC0402(1005)_L 109.75,95.5 r0 top value=100
R711 "Resistors,0402,1%,100" RESC0402(1005)_L 90.25,95.5 r180 top value=100
R712 "Resistors,0402,1%,100" RESC0402(1005)_L 109.75,94.5 r0 top value=100
R713 "Resistors,0402,1%,1.5k" RESC0402(1005)_L 93.5,112.75 r270 top value=1.5k
R714 "Resistors,0402,1%,1.5k" RESC0402(1005)_L 96.5,112.75 r270 top value=1.5k
R715 "Resistors,0402,1%,100" RESC0402(1005)_L 94.5,112.75 r90 top value=100
R716 "Resistors,0402,1%,100" RESC0402(1005)_L 95.5,112.75 r90 top value=100
R717 "Resistors,0402,1%,5.1k" RESC0402(1005)_L 88.75,74.25 r90 top value=5.1k
R718 "Resistors,0402,1%,5.1k" RESC0402(1005)_L 91.75,74.25 r90 top value=5.1k
R801_CT1 "Resistors,0603,1%,120" RESC0603(1608)_L 90.5,114.25 r0 bottom value=120 (schematic designator R801)
R801_CT2 "Resistors,0603,1%,120" RESC0603(1608)_L 109.5,85.75 r180 bottom value=120 (schematic designator R801)
R802_CT1 "Resistors,0603,1%,120" RESC0603(1608)_L 90.5,113 r0 bottom value=120 (schematic designator R802)
R802_CT2 "Resistors,0603,1%,120" RESC0603(1608)_L 109.5,87 r180 bottom value=120 (schematic designator R802)
R803_CT1 "Resistors,0603,1%,120" RESC0603(1608)_L 90.5,115.75 r180 bottom value=120 (schematic designator R803)
R803_CT2 "Resistors,0603,1%,120" RESC0603(1608)_L 109.5,84.25 r0 bottom value=120 (schematic designator R803)
R804_CT1 "Resistors,0603,1%,120" RESC0603(1608)_L 90.5,117 r180 bottom value=120 (schematic designator R804)
R804_CT2 "Resistors,0603,1%,120" RESC0603(1608)_L 109.5,83 r0 bottom value=120 (schematic designator R804)
R901 "Resistors,0402,1%,100" RESC0402(1005)_L 109.75,108 r0 top value=100
R902 "Resistors,0402,1%,100" RESC0402(1005)_L 109.75,109 r0 top value=100
R903 "Resistors,0402,1%,100" RESC0402(1005)_L 109.75,110 r0 top value=100
R904 "Resistors,0402,1%,100" RESC0402(1005)_L 109.75,111 r0 top value=100
R905 "Resistors,0402,1%,100" RESC0402(1005)_L 90.25,101.5 r180 top value=100
R906 "Resistors,0402,1%,100" RESC0402(1005)_L 90.25,100.5 r180 top value=100
R907 "Resistors,0402,1%,100" RESC0402(1005)_L 90.25,99.5 r180 top value=100
R908 "Resistors,0402,1%,100" RESC0402(1005)_L 90.25,98.5 r180 top value=100
R909 "Resistors,0402,1%,100" RESC0402(1005)_L 90.25,92 r180 top value=100
R910 "Resistors,0402,1%,100" RESC0402(1005)_L 90.25,91 r180 top value=100
R911 "Resistors,0402,1%,100" RESC0402(1005)_L 90.25,90 r180 top value=100
R912 "Resistors,0402,1%,100" RESC0402(1005)_L 90.25,89 r180 top value=100
R913 "Resistors,0402,1%,100" RESC0402(1005)_L 90.25,88 r180 top value=100
R914 "Resistors,0402,1%,100" RESC0402(1005)_L 90.25,87 r180 top value=100
R915 "Resistors,0402,1%,100" RESC0402(1005)_L 90.25,86 r180 top value=100
R916 "Resistors,0402,1%,100" RESC0402(1005)_L 90.25,85 r180 top value=100
SW301 "PTS810 SJG 250 SMTR LFS" FP-PTS810_SJG_250_SMTR_LF-MFG 100,69.25 r90 top
U201 "TPS54560BDDAR" FP-DDA0008E-IPC_C 100,128 r180 bottom
U202 "TLV1117-33IDCYR" FP-DCY0004A-MFG 100,115 r270 bottom
U203 "TPS7A2018PDBVR" FP-DBV0005A-MFG 115,100 r270 bottom
U301 "STM32H743VIH6" FP-TFBGA100-A08Q-MFG 100,100 r180 top locked
U401 "ICM-42688-P" PQFN50P300X250X97-14N 108,100 r270 bottom
U402 "ICM-42688-P" PQFN50P300X250X97-14N 99,91.5 r180 bottom
U403 "ICM-42688-P" PQFN50P300X250X97-14N 101,107 r0 bottom
U404 "ICP-20100" FP-ICP-20100-MFG 103,89 r180 bottom
U601 "XL-1615RGBC-WS2812B" "WS2812B 1615" 121,97.5 r180 top
U602 "XL-1615RGBC-WS2812B" "WS2812B 1615" 121,92.5 r180 top
U603 "XL-1615RGBC-WS2812B" "WS2812B 1615" 121,87.5 r180 top
U604 "XL-1615RGBC-WS2812B" "WS2812B 1615" 121,82.5 r180 top
U801_CT1 "TCAN1044VDDFR" FP-DDF0008A-MFG 93,108.5 r135 top (schematic designator U801)
U801_CT2 "TCAN1044VDDFR" FP-DDF0008A-MFG 107,91.5 r315 top (schematic designator U801)
Y301 "TSX-3225 24.0000MF20G-AC3" FP-TSX-3225-MFG 107,97.25 r90 top

## Footprints (in the part's own frame and the unit in brackets; to place one, negate y for a bottom-side part, rotate by r counter-clockwise, add the part's x,y. Pads: shape width x height; smd on the part's side, far side on the other; paste and mask are expansions set on the pad)
693071020811 [mm] "Micro SD Card Connector Push & Push - with Card Detection - 8 Pins"
  rect 0.7x1.9 smd: 1(2.25,7.75) 2(1.15,7.75) 3(0.05,7.75) 4(-1.05,7.75) 5(-2.15,7.75) 6(-3.25,7.75) 7(-4.35,7.75) 8(-5.45,7.75) 9(-6.55,7.75)
  rect 1.7x1.8 smd: 10(-8.1,6.7) 11(7.4,6.7)
  rect 1.4x2.6 smd: 12(-7.85,-2.9) 13(7.85,-2.9)
  round 0.9 hole 0.9 unplated: MH1(-4.95,-3.3)
  oval 1.7x0.9 hole 0.9 slot 1.7 at 0 deg unplated: MH2(3.05,-3.3)
  silkscreen extent -7.35,-7.25 7.35,7.25, body extent -8.2,-7.3 8.2,7.73, height 1.85
CAPC0402(1005)60_L [mm] "Chip Capacitor, Body 1.0x0.5mm, Height 0.6mm, IPC High Density"
  rrect25% 0.5x0.55 smd: 1(-0.45,0) 2(0.45,0)
  silkscreen extent 0,-0.2 0,0.2, body extent -0.5,-0.25 0.5,0.25, height 0.6
CAPC0603(1608)100_L [mm] "Chip Capacitor, Body 1.6x0.8mm, Height 1.0mm, IPC High Density"
  rrect25% 0.66x0.76 smd: 1(-0.7,0) 2(0.7,0)
  silkscreen extent 0,-0.3 0,0.3, body extent -0.8,-0.4 0.8,0.4, height 0.95
CAPC3216X180X50NL20T25 [mm] "Chip Capacitor, 2-Leads, Body 3.40x1.80mm, IPC Medium Density"
  rect 1.3x1.8 smd: 1(-1.4,0) 2(1.4,0)
  silkscreen extent -0.35,-0.8 0.35,0.8, body extent -1.7,-0.9 1.7,0.9, height 1.8
DIOD-B5X0C-2_N [mm] "Molded Diode, 2-Leads, Body 7.11x6.22mm, IPC Medium Density"
  rect 2.45x3.1 smd: 1(-2.85,0) 2(2.85,0)
  silkscreen extent -4.57,-3.15 3.6,3.15, body extent -3.56,-3.11 3.55,3.11, height 2.63
FP-BM04B-GHS-TBT_LF_SN-MFG [mm]
  rect 0.6x1.7 smd paste+0 mask+0: 1(1.875,2.325) 2(0.625,2.325) 3(-0.625,2.325) 4(-1.875,2.325)
  rect 1x2.8 smd paste+0 mask+0: 5(-3.725,-1.025) 6(3.725,-1.025)
  silkscreen extent -4.13,-2.12 4.13,3.92, body extent -4.33,-2.52 4.33,3.27, height 0.25
FP-BM06B-GHS-TBT_LF_SN-MFG [mm]
  rect 0.6x1.7 smd paste+0 mask+0: 1(-3.125,-2.325) 2(-1.875,-2.325) 3(-0.625,-2.325) 4(0.625,-2.325) 5(1.875,-2.325) 6(3.125,-2.325)
  rect 1x2.8 smd paste+0 mask+0: 7(-4.975,1.025) 8(4.975,1.025)
  silkscreen extent -5.38,-3.9 5.38,2.12, body extent -5.58,-3.27 5.58,2.52, height 0.25
FP-DBV0005A-MFG [mm]
  rrect17% 1.1x0.6 smd paste+0 mask+0: 1(-1.3,0.95) 2(-1.3,0) 3(-1.3,-0.95) 4(1.3,-0.95) 5(1.3,0.95)
  silkscreen extent -0.38,-1.53 0.87,1.53, body extent -1.4,-1.45 1.4,1.45, height 1.45
FP-DCY0004A-MFG [mm]
  rect 2.15x0.95 smd paste+0 mask+0: 1(-2.9,2.3) 2(-2.9,0) 3(-2.9,-2.3)
  rect 2.15x3.25 smd paste+0 mask+0: 4(2.9,0)
  silkscreen extent -1.85,-3.35 1.85,3.35, body extent -3.5,-3.25 3.5,3.25, height 1.8
FP-DDA0008E-IPC_C [mm]
  rect 1.874x0.542 smd paste+0 mask+0: 1(-2.316,1.905)
  rrect100% 1.874x0.542 smd paste+0 mask+0: 2(-2.316,0.635) 3(-2.316,-0.635) 4(-2.316,-1.905) 5(2.316,-1.905) 6(2.316,-0.635) 7(2.316,0.635) 8(2.316,1.905)
  rect 2.025x3.1 smd paste-1000 mask+0: 9(0,0)
  silkscreen extent -3.98,-2.45 0.75,2.45, body extent -3,-2.45 3,2.45, height 1.7
FP-DDF0008A-MFG [mm]
  rrect22% 1.05x0.45 smd paste+0 mask+0: 1(-1.3,0.975) 2(-1.3,0.325) 3(-1.3,-0.325) 4(-1.3,-0.975) 5(1.3,-0.975) 6(1.3,-0.325) 7(1.3,0.325) 8(1.3,0.975)
  silkscreen extent -2.5,-1.47 0.4,1.47, body extent -1.41,-1.45 1.41,1.45, height 1.1
FP-ICP-20100-MFG [mm]
  rect 0.325x0.25 smd paste+0 mask+0: 1(-0.787,0.25) 2(-0.787,-0.25) 6(0.787,-0.25) 7(0.787,0.25)
  rect 0.25x0.325 smd paste+0 mask+0: 3(-0.5,-0.787) 4(0,-0.787) 5(0.5,-0.787) 8(0.5,0.787) 9(0,0.787) 10(-0.5,0.787)
  silkscreen extent -1.63,-1.03 1.03,1.62, body extent -1,-1 1,1, height 0.85
FP-MTLW-104-05-G-S-185-MFG [mm]
  rrect50% 1.6x1.6 hole 1 paste-2539.97 mask+0.1: 1(-3.81,0)
  round 1.6 / inner round 0 / far side round 1.6 hole 1 paste-2539.97 mask+0.1: 2(-1.27,0) 3(1.27,0) 4(3.81,0)
  silkscreen extent -5.21,-1.31 5.21,1.31, body extent -5.31,-1.41 5.31,1.41, height 0.25
FP-PTS810_SJG_250_SMTR_LF-MFG [mm]
  rect 1.05x0.65 smd paste+0 mask+0: 1(-2.075,1.075) 2(2.075,1.075) 3(-2.075,-1.075) 4(2.075,-1.075)
  silkscreen extent -2.1,-1.6 2.1,1.6, body extent -2.7,-1.7 2.7,1.7, height 0.25
FP-TFBGA100-A08Q-MFG [mm]
  round 0.4 smd paste+0 mask+0: A1(-3.6,3.6) A2(-2.8,3.6) A3(-2,3.6) A4(-1.2,3.6) A5(-0.4,3.6) A6(0.4,3.6) A7(1.2,3.6) A8(2,3.6) A9(2.8,3.6) A10(3.6,3.6) B1(-3.6,2.8) B2(-2.8,2.8) B3(-2,2.8) B4(-1.2,2.8) B5(-0.4,2.8) B6(0.4,2.8) B7(1.2,2.8) B8(2,2.8) B9(2.8,2.8) B10(3.6,2.8) C1(-3.6,2) C2(-2.8,2) C3(-2,2) C4(-1.2,2) C5(-0.4,2) C6(0.4,2) C7(1.2,2) C8(2,2) C9(2.8,2) C10(3.6,2) D1(-3.6,1.2) D2(-2.8,1.2) D3(-2,1.2) D4(-1.2,1.2) D5(-0.4,1.2) D6(0.4,1.2) D7(1.2,1.2) D8(2,1.2) D9(2.8,1.2) D10(3.6,1.2) E1(-3.6,0.4) E2(-2.8,0.4) E3(-2,0.4) E4(-1.2,0.4) E5(-0.4,0.4) E6(0.4,0.4) E7(1.2,0.4) E8(2,0.4) E9(2.8,0.4) E10(3.6,0.4) F1(-3.6,-0.4) F2(-2.8,-0.4) F3(-2,-0.4) F4(-1.2,-0.4) F5(-0.4,-0.4) F6(0.4,-0.4) F7(1.2,-0.4) F8(2,-0.4) F9(2.8,-0.4) F10(3.6,-0.4) G1(-3.6,-1.2) G2(-2.8,-1.2) G3(-2,-1.2) G4(-1.2,-1.2) G5(-0.4,-1.2) G6(0.4,-1.2) G7(1.2,-1.2) G8(2,-1.2) G9(2.8,-1.2) G10(3.6,-1.2) H1(-3.6,-2) H2(-2.8,-2) H3(-2,-2) H4(-1.2,-2) H5(-0.4,-2) H6(0.4,-2) H7(1.2,-2) H8(2,-2) H9(2.8,-2) H10(3.6,-2) J1(-3.6,-2.8) J2(-2.8,-2.8) J3(-2,-2.8) J4(-1.2,-2.8) J5(-0.4,-2.8) J6(0.4,-2.8) J7(1.2,-2.8) J8(2,-2.8) J9(2.8,-2.8) J10(3.6,-2.8) K1(-3.6,-3.6) K2(-2.8,-3.6) K3(-2,-3.6) K4(-1.2,-3.6) K5(-0.4,-3.6) K6(0.4,-3.6) K7(1.2,-3.6) K8(2,-3.6) K9(2.8,-3.6) K10(3.6,-3.6)
  silkscreen extent -4.82,-4.33 4.33,4.82, body extent -4,-4 4,4, height 1.1
FP-TSW-104-07-G-T-MFG [mm]
  rrect50% 1.6x1.6 hole 1 paste-2539.97 mask+0.1: 1(-3.81,-2.54) 4(-1.27,-2.54) 7(1.27,-2.54) 10(3.81,-2.54)
  round 1.6 / inner round 0 / far side round 1.6 hole 1 paste-2539.97 mask+0.1: 2(-3.81,0) 3(-3.81,2.54) 5(-1.27,0) 6(-1.27,2.54) 8(1.27,0) 9(1.27,2.54) 11(3.81,0) 12(3.81,2.54)
  silkscreen extent -5.21,-3.88 5.21,3.88, body extent -5.31,-3.98 5.31,3.98, height 0.25
FP-TSW-108-25-T-T-MFG [mm]
  rrect50% 1.6x1.6 hole 1 paste-2539.97 mask+0.1: 1(-8.89,-2.54) 4(-6.35,-2.54) 7(-3.81,-2.54) 10(-1.27,-2.54) 13(1.27,-2.54) 16(3.81,-2.54) 19(6.35,-2.54) 22(8.89,-2.54)
  round 1.6 / inner round 0 / far side round 1.6 hole 1 paste-2539.97 mask+0.1: 2(-8.89,0) 3(-8.89,2.54) 5(-6.35,0) 6(-6.35,2.54) 8(-3.81,0) 9(-3.81,2.54) 11(-1.27,0) 12(-1.27,2.54) 14(1.27,0) 15(1.27,2.54) 17(3.81,0) 18(3.81,2.54) 20(6.35,0) 21(6.35,2.54) 23(8.89,0) 24(8.89,2.54)
  silkscreen extent -10.29,-3.88 10.29,3.88, body extent -10.39,-3.98 10.39,3.98, height 0.25
FP-TSX-3225-MFG [mm]
  rect 1.4x1.15 smd paste+0 mask+0: 1(-1.1,-0.8) 2(1.1,-0.8) 3(1.1,0.8) 4(-1.1,0.8)
  body extent -1.6,-1.25 1.6,1.25, height 0.6
PQFN50P300X250X97-14N [mm]
  rrect50% 0.59x0.35 smd mask+0: 1(-1.165,0.75) 2(-1.165,0.25) 3(-1.165,-0.25) 4(-1.165,-0.75) 8(1.165,-0.75) 9(1.165,-0.25) 10(1.165,0.25) 11(1.165,0.75)
  rrect50% 0.35x0.59 smd mask+0: 5(-0.5,-0.915) 6(0,-0.915) 7(0.5,-0.915) 12(0.5,0.915) 13(0,0.915) 14(-0.5,0.915)
  silkscreen extent -2.1,-1.25 1.5,1.25
RESC0402(1005)_L [mm] "Chip Resistor, Body 1.0x0.5mm, IPC High Density"
  rrect25% 0.5x0.55 smd: 1(-0.45,0) 2(0.45,0)
  silkscreen extent 0,-0.2 0,0.2, body extent -0.5,-0.25 0.5,0.25, height 0.3
RESC0603(1608)_L [mm] "Chip Resistor, Body 1.6x0.8mm, IPC High Density"
  rrect25% 0.66x0.76 smd: 1(-0.7,0) 2(0.7,0)
  silkscreen extent 0,-0.3 0,0.3, body extent -0.8,-0.4 0.8,0.4, height 0.45
USB-TYPE-C-12+4P [mm]
  oval 1x2.1 hole 0.6 slot 1.7 at 90 deg mask+0.05: 1(-4.32,1.801) 2(4.32,1.801)
  oval 1x1.8 hole 0.6 slot 1.4 at 90 deg mask+0.05: 3(-4.32,-2.379) 4(4.32,-2.379)
  round 0 hole 0.65 unplated: 6(-2.89,1.302) 7(2.89,1.301)
  rect 0.6x1.3 smd mask+0.05: A1B12(-3.2,2.379) A4B9(-2.4,2.379) B1A12(3.2,2.379) B4A9(2.4,2.379)
  rect 0.3x1.3 smd mask+0.05: A5(-1.25,2.379) A6(-0.25,2.379) A7(0.25,2.379) A8(1.25,2.379) B5(1.75,2.379) B6(0.75,2.379) B7(-0.75,2.379) B8(-1.75,2.379)
  Keep-Out Layer board cut-out: 3.215,1.301 3.183,1.442 3.093,1.555 2.962,1.618 2.818,1.618 2.687,1.555 2.597,1.442 2.565,1.301 2.565,1.301 2.597,1.16 2.687,1.047 2.818,0.984 2.962,0.984 3.093,1.047 3.183,1.16 3.215,1.301
  Keep-Out Layer board cut-out: -2.565,1.302 -2.597,1.443 -2.687,1.556 -2.818,1.619 -2.962,1.619 -3.093,1.556 -3.183,1.443 -3.215,1.302 -3.215,1.302 -3.183,1.161 -3.093,1.048 -2.962,0.985 -2.818,0.985 -2.687,1.048 -2.597,1.161 -2.565,1.302
  silkscreen extent -4.48,-4.99 4.48,0.44, body extent -4.47,-4.95 4.47,2.95, height 3.23
WE-PD_1210 [mm] "SMT Shielded Power Inductor, 2-leads, body 12x12mm"
  rect 5.4x2.9 smd: 1(0,-4.95) 2(0,4.95)
  silkscreen extent -6.25,-6.25 6.25,6.25, body extent -6,-6 6,6, height 9.46
"WS2812B 1615" [mm]
  rect 0.45x0.65 smd mask+0.1: 1(-0.625,0.425) 2(0.625,0.425) 3(-0.625,-0.425) 4(0.625,-0.425)
  silkscreen extent -1.4,-0.1 -1.2,0.1

## Part data
C201 C202 C302 C303 C304 C305 C307 C311 C401 C403 C404 C406 C407 C409 C410 C411 C501 C601 C602 C603 C604 C801_CT1 C801_CT2 C802_CT1 C802_CT2 C803_CT1 C803_CT2: library part Capacitors, "Capacitor", Case/Package=0402, Voltage Rating=16V, Component Type=Capacitors
C203 C204 C205 C206 C207 C208: library part Capacitors, "Capacitor", Case/Package=1206, Voltage Rating=100V, Component Type=Capacitors
C209 C210 C211 C212 C213 C214: library part Capacitors, "Capacitor", Case/Package=1206, Voltage Rating=25V, Component Type=Capacitors
C215 C216 C217 C312 C313: library part Capacitors, "Capacitor", Case/Package=0402, Component Type=Capacitors
C218 C219 C220 C221 C222 C223 C224 C225 C301 C306 C308 C309 C310 C402 C405 C408: library part Capacitors, "Capacitor", Case/Package=0603, Voltage Rating=16V, Component Type=Capacitors
D201 D202: library part CMP-2000-05098-2, "Schottky Barrier Rectifier, 5 A, 60 V, -55 to 125 degC, 2-Pin SMD, RoHS, Tape and Reel", If - Forward Current=5A, Ifsm - Forward Surge Current=100A, Ir - Reverse Current=500uA, Manufacturer=DiodesIncorporated, Maximum Operating Temperature=+125C, Minimum Operating Temperature=-55C, Operating Temperature Range=-55Cto+125C, Package / Case=SMC, Vf - Forward Voltage=0.7V, Vrrm - Repetitive Reverse Voltage=60V, Brand=DiodesIncorporated, Configuration=Single, Datasheet URL=https://datasheet.ciiva.com/27052/1538961-27052355.pdf, Datasheet Version="Rev. 7-2, 06/2007", Factory Pack Quantity=3000, Height=2.5mm, Length=7.11mm, Manufacturer URL=http://www.diodes.com/, Mounting Style=SMD/SMT, Packaging=Reel, Product=SchottkyDiodes, Product Category=SchottkyDiodes&Rectifiers, RoHS=True, Series=B560, Technology=Si, Termination Style=SMD/SMT, Type=SchottkyBarrierRectifier, Unit Weight=0.007408oz, Width=6.22mm
J301: library part CMP-02766-000562-1, "CONN HEADER VERT 4POS 2.54MM", Color=Black, Contact Resistance=15mR, Max Operating Temperature=105°C, Min Operating Temperature=-40°C, Connector Type="Male Pin", Contact Material=Brass, Contact Mating Length=0.185inch, Contact Plating=Gold, Depth=2.48mm, Gender=Male, Height=6.4mm, Housing Color=Black, Housing Material=Polymer, Length=29.64mm, Mount="Through Hole", Number of Contacts=4, Number of Positions=4, Number of Rows=1, Orientation=Straight, Packaging=Rail/Tube, Pitch=2.54mm, Radiation Hardening=No, Termination=Solder
J501: library part CMP-03913-107725714-1, "693071020811 Micro Sd Card, Push-Push, 8Pos, Smt Rohs Compliant: Yes", Current Rating=500mA, Insulation Resistance=100MΩ, Max Operating Temperature=85°C, Min Operating Temperature=-40°C, NexarPartId=107725714, Number of Pins=8, Packaging="Tape and Reel", RoHS=Compliant
J701: library part CMP-17439-000166-1, "CONN HEADER SMD 6POS 1.25MM", Current Rating=1A, Housing Color=Natural, Voltage Rating=50V, Contact Material=Bronze, Housing Material=Nylon, Lead Free="Lead Free", Mount="Surface Mount", Number of Contacts=6, Number of Positions=6, Number of Rows=1, Orientation=Straight, Packaging="Cut Tape", Pitch=1.25mm, Series=GH, Termination=Solder
J702 J703 J704 J705 J706 J707 J709: library part CMP-17439-000062-2, "CONN HEADER SMD 4POS 1.25MM", Case/Package=SMD/SMT, Current Rating=1A, Housing Color=Natural, Max Operating Temperature=85°C, Min Operating Temperature=-25°C, Voltage Rating=50V, Contact Material=Bronze, Contact Plating=Tin, Gender=Male, Housing Material=Nylon, Lead Free="Lead Free", Number of Contacts=4, Number of Positions=4, Number of Rows=4, Orientation=Straight, Packaging="Cut Tape", Pitch=1.25mm, REACH SVHC="No SVHC", Series=GH, Termination=Crimp, Voltage Rating (AC)=50V, Wire/Cable Gauge=26AWG
J708: "Connector Type:Type-C Standard:- Gender:Female Number of Contacts:16 Number of Ports:1 Mounting Style:Surface Mount Current Rating - Power (Max):3A Operating Temperature Range:-25℃~+85℃ Operating Temperature Range:-25℃~+85℃", Current Rating - Power (Max)=3A, JLCPCB Part Class="Extended Part", LCSC Part Name="Type-C 母座 卧贴", Manufacturer=DEALON(德艺隆), Operating Temperature Range=-25℃~+85℃, Add into BOM=yes, Connector Type=Type-C, Convert to PCB=yes, Datasheet=https://atta.szlcsc.com/upload/public/pdf/source/20211217/CCD3D517E355E8E0CC52ABD8D5784AD8.pdf, Device=USB-TYPE-C-019, Gender=Female, Manufacturer Part=USB-TYPE-C-019, Mounting Style="Surface Mount", Number of Contacts=16, Number of Ports=1, Standard=-, Supplier=LCSC, Supplier Footprint=SMD, Supplier Part=C2927039, Symbol=USB-TYPE-C-019
J901 J902: library part CMP-1024-00347-2, "CONN HEADER VERT 12POS 2.54MM", Manufacturer=Samtec, Temperature="-55°C to +125°C", Temperature Range High=+125°C, Temperature Range Low=-55°C, Automotive=No, Category=Conn, ComponentLink2Description=Datasheet, ComponentLink2URL=http://suddendocs.samtec.com/prints/tsw-xxx-xx-xxx-x-xx-xxx-mkt.pdf, Conn Gender=Male, Conn Orientation=Straight, Contact Material=Gold,Nickel, Device Class L1=Connectors, Device Class L2="Headers and Wire Housings", Device Class L3=unset, Digikey Description="CONN HEADER VERT 12POS 2.54MM", Footprint Url=http://suddendocs.samtec.com/prints/tsw-xxx-xx-x-x-xx-xxx-footprint.pdf, Height=8.64mm, Lead Free=Yes, Manufacturer Part Number=TSW-104-07-G-T, Number of Contacts=12, Number of Rows=3, Octopart=https://octopart.com/tsw-104-07-g-t-samtec-8296723, Package=TSW-104-07-G-T, Pitch=2.54mm, RoHS=TRUE
J903: library part CMP-02766-000094-1, "CONN HEADER VERT 24POS 2.54MM", Contact Material=Bronze, Contact Plating=Tin, Gender=Male, Mount="Through Hole", Number of Contacts=24, Number of Rows=3, Packaging=Bulk, Pitch=2.54mm, Radiation Hardening=No, REACH SVHC="No SVHC", Termination=Solder
L201: library part CMP-0227-00034-2, Ambient Temperature Range High=85°C, Ambient Temperature Range Low=-40°C, Case Code (Imperial)=1210, Case Code (Metric)=3225, Case/Package=Nonstandard, Current Rating=7.1A, DC Resistance (DCR)=13mΩ, Inductance=10µH, Inductance Tolerance=20%, Max Operating Temperature=125°C, Resistance=21mΩ, Saturation Current=10.5A, Self Resonant Frequency=21MHz, Test Frequency=1kHz, Composition=Wirewound, Core Material=Ferrite, Depth=12mm, Height=10mm, Height - Seated (Max)=10.0076mm, Lead Free="Lead Free", Lead Pitch=7mm, Length=12mm, Max DC Current=7.1A, Min Operating Temperature=-40°C, Mount="Surface Mount", NexarPartId=21642419, Number of Pins=2, Packaging="Tape & Reel (TR)", REACH SVHC=Unknown, RMS Current (Irms)=7.1A, RoHS=Compliant, Series Resistance=21mΩ, Shielding=Shielded, Termination=SMD/SMT, Tolerance=20%, Weight=4.535924g, Width=12mm
R201 R202 R203 R204 R205 R206 R207 R208 R209 R301 R401 R402 R501 R502 R503 R504 R505 R601 R701 R702 R703 R704 R705 R706 R707 R708 R709 R710 R711 R712 R713 R714 R715 R716 R717 R718 R901 R902 R903 R904 R905 R906 R907 R908 R909 R910 R911 R912 R913 R914 R915 R916: library part Resistors, "Resistor", Case/Package=0402, Tolerance=1%, Component Type=Resistors
R801_CT1 R801_CT2 R802_CT1 R802_CT2 R803_CT1 R803_CT2 R804_CT1 R804_CT2: library part Resistors, "Resistor", Case/Package=0603, Tolerance=1%, Component Type=Resistors
SW301: library part CMP-10040-000011-1, "SWITCH TACTILE SPST-NO 0.05A 16V", Contact Resistance=500mΩ, Current Rating=50mA, Manufacturer="C&K Components", Operating Force=400gf, Temperature="-40°C to +85°C", Temperature Range High=+85°C, Temperature Range Low=-40°C, Voltage Rating Dc=16V, Automotive=No, Category=Switch, ComponentLink2Description=Datasheet, ComponentLink2URL=https://www.ckswitches.com/media/1476/pts810.pdf, Device Class L1=Electromechanical, Device Class L2=Switches, Device Class L3="Tactile Switches", Digikey Description="SWITCH TACTILE SPST-NO 0.05A 16V", Electromechanical Life=100000Cycles, Height=2.7mm, Lead Free=Yes, Manufacturer Part Number="PTS810 SJG 250 SMTR LFS", Mouser Description="Switch Tactile N.O. SPST Button J-Bend 0.05A 16VDC 100000Cycles 3.92N SMD T/R", Octopart=https://octopart.com/pts810sjg250smtrlfs-c%26k+components-29380277, Package="PTS810 SJG 250 SMTR LFS", RoHS=TRUE, Throw Configuration=SPST-NO
U201: library part CMP-04918-000346-1, "IC REG CTRLR"
U202: library part CMP-04917-000056-1, "IC REG LIN 3.3V 800MA SOT223-4", Dropout Voltage=1.2V, Manufacturer="Texas Instruments", Max Junction Temp=+125°C, Max Supply Voltage=15V, Min Supply Voltage=4.7V, Nominal Supply Current=5mA, Output Current=0.8A, Output Voltage=3.3V, Package=DCY0004A, Temperature="-40°C to +125°C", Temperature Range Low=-40°C, Automotive=No, Category=IC, ComponentLink2Description=Datasheet, ComponentLink2URL=http://www.ti.com/lit/ds/symlink/tlv1117.pdf, Device Class L1="Integrated Circuits (ICs)", Device Class L2="Power Management ICs", Device Class L3="Voltage Regulators - Linear", Digikey Description="IC REG LIN 3.3V 800MA SOT223-4", Height=1.8mm, Lead Free=Yes, Manufacturer Part Number=TLV1117-33IDCYR, Mouser Description="LDO Voltage Regulators Fixed LDO Volt Reg", Number Of Outputs=1, Octopart=https://octopart.com/tlv1117-33idcyr-texas+instruments-669250, Output Type=Fixed, RoHS=TRUE, Standoff Height=0.02mm, Temperature Range High=+125°C
U203: library part CMP-04917-000324-1, "IC REG LINEAR 1.8V 300MA SOT23-5", RoHS Compliant=Yes
U301: library part CMP-12105-000020-1, "HIGH-PERFORMANCE AND DSP WITH DP", Ambient Temperature Range High=+85°C, Ambient Temperature Range Low=-40°C, Frequency=480MHz, Manufacturer=STMicroelectronics, Max Junction Temp=+125°C, Max Supply Voltage=3.6V, Min Supply Voltage=1.71V, Package=TFBGA100-A08Q, Temperature="-40°C to +85°C", Automotive=No, Category=IC, ComponentLink2Description=Datasheet, ComponentLink2URL=https://www.st.com/resource/en/datasheet/stm32h743vi.pdf, Core Architecture="ARM Cortex-M7", Data Bus Width=32bits, Device Class L1="Integrated Circuits (ICs)", Device Class L2="Embedded Processors and Controllers", Device Class L3=Microcontrollers, Digikey Description="HIGH-PERFORMANCE AND DSP WITH DP", Height=1.1mm, Interface=I2C,SPI,UART,USART,CAN,USB,Ethernet,I2S,SMBus, Ipc Land Pattern Name=BGA100C80P10X10_800X800X110, Lead Free=Yes, Manufacturer Part Number=STM32H743VIH6, Memory Size=2MBytes, Memory Type=FLASH, Mouser Description="MCU 32-Bit STM32H743VI ARM Cortex M7 RISC 2MB Flash 1.8V/2.5V/3.3V 100-Pin TFBGA Tray", Number Of A/D Converters=3, Number Of Adc Channels=36, Number Of Cores=1, Number Of Ethernet Channels=1, Number Of I2C Channels=4, Number Of I/Os=82, Number Of Pwm Channels=2, Number Of Spi Channels=6, Number Of Timers/Counters=22, Number Of Uart Channels=9, Number Of Usb Channels=1, Octopart=https://octopart.com/stm32h743vih6-stmicroelectronics-93590710, Ram Size=1MBytes, RoHS=TRUE, Standoff Height=0.15mm, Temperature Range High=+85°C, Temperature Range Low=-40°C
U401 U402 U403: "Accelerometer, Gyroscope, 6 Axis Sensor Output", Package=None, Availability=Unavailable, MP=ICM-42688-P, Price=None
U404: library part CMP-03292-111934633-1, "ICP-20100 Barometric Pressure and Temperature Sensor IC Digital Output 1.8V/3.3V 10-Pin LGA T/R", Min Operating Temperature=-40°C, Length=2mm, Max Length=2.08mm, Max Thickness=800µm, Max Width=2.08mm, Min Length=1.92mm, Min Thickness=640µm, Min Width=1.92mm, NexarPartId=111934633, Width=2mm
U601 U602 U603 U604: library part "WS2812B 1615"
U801_CT1 U801_CT2: library part CMP-04872-000216-1, "IC TRANSCEIVER FULL 1/1 SOT23-8"
Y301: library part CMP-36405-000018-1, "CRYSTAL 24.0000MHZ 9PF SMD", Case/Package=SMD/SMT, ESR (Equivalent Series Resistance)=40R, Frequency=24MHz, Frequency Stability=20ppm, Frequency Tolerance=10ppm, Load Capacitance=12pF, Max Operating Temperature=105°C, Min Operating Temperature=-40°C, Package Quantity=250, Depth=2.5mm, Drive Level=200uW, Height=0.024inch, Lead Free="Lead Free", Length=3.2mm, Mount="Surface Mount", Number of Pins=4, Packaging="Tape and Reel", RoHS Compliant=Yes, Series=TSX-3225, Termination=SMD/SMT, Tolerance=10ppm, Weight=0.000564oz, Width=2.5mm

## Free pads (board coordinates)
  round 0 hole 4 unplated paste-2539.97 mask+0: MH2(78.5,68.5) MH2(78.5,131.5) MH2(121.5,68.5) MH2(121.5,131.5)
  rrect50% 5x4 / inner rrect50% 0x0 / far side rrect50% 5x4 all layers, no hole paste-2539.97 mask+0.1: PW(78.5,117.25) PW(78.5,122.25) PW(121.5,117.25) PW(121.5,122.25)

## Via types
v1: diameter 0.5/0/0/0/0/0.5 (per signal layer), hole 0.3, Layer 1 SIG to Layer 6 SIG, tented both sides, 192 vias
v2: diameter 0.7/0/0/0/0/0.7 (per signal layer), hole 0.5, Layer 1 SIG to Layer 6 SIG, tented both sides, 185 vias
v3: diameter 0.4/0/0/0/0/0.4 (per signal layer), hole 0.3, Layer 1 SIG to Layer 6 SIG, tented both sides, 41 vias
v4: diameter 0.5/0/0/0.5/0/0.5 (per signal layer), hole 0.3, Layer 1 SIG to Layer 6 SIG, tented both sides, 4 vias
v5: diameter 0.4/0/0/0.4/0/0.4 (per signal layer), hole 0.3, Layer 1 SIG to Layer 6 SIG, tented both sides, 4 vias

## Nets (pads, with @x,y where several pads share a name; then routed paths per layer and width w, separated by ;. In a path a pad name is that pad's centre, name@x,y a point inside that pad or via, vN(x,y) a via of type N, cw(c..) or ccw(c..) an arc to the next point about the centre after c; other vN are vias at no path point)
"+1.8 LDO": C225.1 C401.1 C402.1 C404.1 C405.1 C407.1 C408.1 C410.1 U203.5 U401.8 U402.8 U403.8 U404.5 | length 10.4
  Layer 6 SIG w0.25: C404.1@97.55,89.5 97.835,89.785 U402.8@97.835,90.75 ; v1(101.25,88.55) 101.587,88.213 U404.5@102.5,88.213 ; U403.8@102.165,107.75 102.165,108.715 C407.1@102.45,109 ; U401.8@108.75,98.835 109.715,98.835 C401.1@110,98.55
  Layer 6 SIG w0.4: v1(97.3,88.5) 97.55,88.75 C404.1@97.55,89.5 ; C407.1@102.45,109 102.45,109.75 v1(102.7,110) ; C401.1@110,98.55 110.75,98.55 v1(111,98.3)
  Layer 6 SIG w0.5: v2(112.75,99.3) 113.45,99.3 U203.5@114.05,98.7
"+3.3 LDO": C221.1 C222.1 C223.1 C224.1 C301.1 C302.1 C303.1 C304.1 C305.1 C306.1 C307.1 C308.1 C403.1 C406.1 C409.1 C411.1 C501.1 C803_CT1.1 C803_CT2.1 J301.4 J501.4 R401.1 R402.1 R501.1 R502.1 R503.1 R504.1 R505.1 R713.1 R714.1 SW301.2 U202.2 U202.4 U203.1 U203.3 U301.B2 U301.D2 U301.F4 U301.F5 U301.F6 U301.F7 U301.H1 U301.K1 U401.5 U402.5 U403.5 U404.1 U404.10 U801_CT1.5 U801_CT2.5 | length 29.4
  Layer 1 SIG w0.1: U301.F7@98.8,100.4 v3(99.6,100.4) ; U301.B2@102.8,97.2 103.2,97.6 103.2,98.4 v3(102.8,98.8)
  Layer 1 SIG w0.2: v1(98.25,71.5) 98.75,71.5 SW301.2@98.925,71.325
  Layer 1 SIG w0.4: U801_CT1.5@92.77,110.109 93.972,110.109 v1(94.096,110.232) ; v3(99.6,100.4) v3(100.4,100.4) v3(101.2,100.4) ; U301.H1@103.6,102 104,102.057 C307.1@105,102.2 v1(106,101.7) ; U301.K1@103.6,103.6 104,103.7 C304.1@105,103.95 v1(106,104.2) ; v1(105.904,89.768) 106.028,89.891 U801_CT2.5@107.23,89.891
  Layer 6 SIG w0.2: v1(88.55,83) 88.55,83.3 88.95,83.7 R503.1@88.95,84 ; v1(90.55,83) 90.55,83.3 90.95,83.7 R504.1@90.95,84 ; v1(92.55,83) 92.55,83.3 92.95,83.7 R501.1@92.95,84 ; U203.1@114.05,101.3 114.05,100.95 114.75,100.25 115.25,100.25 115.95,100.95 U203.3@115.95,101.3
  Layer 6 SIG w0.25: U402.5@99.5,90.585 99.5,90.452 100.2,89.752 v1(100.2,89.5) ; v1(99.8,109) 99.8,108.748 100.5,108.048 U403.5@100.5,107.915 ; v1(103.45,90.75) 103.5,90.7 U404.10@103.5,89.787 103.5,89.537 U404.1@103.787,89.25 ; U401.5@108.915,100.5 109.048,100.5 109.748,101.2 v1(110,101.2)
  Layer 6 SIG w0.4: J501.4@92.55,81 v1(92.55,83) ; v3(101.2,100.4) 101.5,100.7 C308.1@101.6,100.7
  Layer 6 SIG w0.5: v2(113.8,102.75) 114.05,102.5 U203.1@114.05,101.3
  other v1: 103.45,87.25 104.75,89.45 93.5,113.2 96.5,113.2
  other v2: 98,114 99,114 100,114 98,115 99,115 100,115 98,116 99,116 100,116
"+5 BUCK": C209.1 C210.1 C211.1 C212.1 C213.1 C214.1 C218.1 C219.1 C220.1 C601.1 C602.1 C603.1 C604.1 C801_CT1.1 C801_CT2.1 D201.1 J701.1 J702.1 J703.1 J704.1 J705.1 J706.1 J707.1 J709.1 L201.2 R203.1 U202.3 U601.2 U602.2 U603.2 U604.2 U801_CT1.3 U801_CT2.3 | length 10
  Layer 1 SIG w0.4: U801_CT1.3@94.149,107.811 94.909,107.05 v1(95.086,107.05) ; v1(104.914,92.95) 105.091,92.95 U801_CT2.3@105.851,92.189 ; v1(119.5,82.05) 120.35,82.05 U604.2@120.375,82.075 ; v1(119.5,87.05) 120.35,87.05 U603.2@120.375,87.075 ; v1(119.5,92.05) 120.35,92.05 U602.2@120.375,92.075 ; v1(119.5,97.05) 120.35,97.05 U601.2@120.375,97.075
  Layer 6 SIG w0.2: v2(93,124.5) 93,123.75 93.55,123.2 R203.1@96,123.2
  other v1: 98.75,84 100,84 101.25,84 98.75,84.75 100,84.75 101.25,84.75
  other v2: 111.175,86.875 112.175,86.875 87.825,93.125 88.825,93.125 111.175,96.875 112.175,96.875 87.825,103.125 88.825,103.125 111.175,106.875 112.175,106.875 87.825,113.125 88.825,113.125 93.125,114.175 103.125,114.175 93.125,115.175 103.125,115.175 85.25,124.5 86.25,124.5 87.5,124.5 88.5,124.5 89.75,124.5 90.75,124.5 92,124.5 85.25,125.5 86.25,125.5 87.5,125.5 88.5,125.5 89.75,125.5 90.75,125.5 92,125.5 93,125.5
"+5 SERVO": J901.2 J901.5 J901.8 J901.11 J902.2 J902.5 J902.8 J902.11 J903.2 J903.5 J903.8 J903.11 J903.14 J903.17 J903.20 J903.23 pad.PW@78.5,117.25 | length 91.7
  Layer 1 SIG w2: v2(78.5,117.25) 79.04,116.71 J902.2@79.04,110.62 J902.5@79.04,108.08 J902.8@79.04,105.54 J902.11@79.04,103 J903.2@79.04,97 J903.5@79.04,94.46 J903.8@79.04,91.92 J903.11@79.04,89.38 J903.14@79.04,86.84 J903.17@79.04,84.3 J903.20@79.04,81.76 J903.23@79.04,79.22 ; J901.2@120.96,103 J901.5@120.96,105.54 J901.8@120.96,108.08 J901.11@120.96,110.62
  Layer 6 SIG w2: v2(78.5,117.25) 79.04,116.71 J902.2@79.04,110.62 J902.5@79.04,108.08 J902.8@79.04,105.54 J902.11@79.04,103 J903.2@79.04,97 J903.5@79.04,94.46 J903.8@79.04,91.92 J903.11@79.04,89.38 J903.14@79.04,86.84 J903.17@79.04,84.3 J903.20@79.04,81.76 J903.23@79.04,79.22 ; J901.2@120.96,103 J901.5@120.96,105.54 J901.8@120.96,108.08 J901.11@120.96,110.62
  other v2: 76.5,116.25 77.5,116.25 78.5,116.25 79.5,116.25 80.5,116.25 76.5,117.25 77.5,117.25 79.5,117.25 80.5,117.25 76.5,118.25 77.5,118.25 78.5,118.25 79.5,118.25 80.5,118.25
"+5 USB": D201.2 J708.A4B9 J708.B4A9 | length 5.3
  Layer 1 SIG w0.5: v1(87.75,75) v1(87.75,74.25) v1(87.75,73.5) 87.85,73.4 J708.A4B9@87.85,72.379 ; J708.B4A9@92.65,72.379 92.65,73.4 v1(92.75,73.5) v1(92.75,74.25) v1(92.75,75)
  other v1: 98.75,77.25 100,77.25 101.25,77.25 98.75,78 100,78 101.25,78
+BATT: C203.1 C204.1 C205.1 C206.1 C207.1 C208.1 pad.PW@121.5,122.25 R201.1 U201.2 | length 25
  Layer 6 SIG w0.2: R201.1@103.7,105.25 119.5,121.05 v2(119.5,121.25) v2(120.5,121.25) v2(121.5,122.25)
  other v2: 121.5,121.25 122.5,121.25 123.5,121.25 119.5,122.25 120.5,122.25 122.5,122.25 123.5,122.25 119.5,123.25 120.5,123.25 121.5,123.25 122.5,123.25 123.5,123.25 107,130.5 108,130.5 109.25,130.5 110.25,130.5 111.5,130.5 112.5,130.5 113.75,130.5 114.75,130.5 107,131.5 108,131.5 109.25,131.5 110.25,131.5 111.5,131.5 112.5,131.5 113.75,131.5 114.75,131.5
BARO_I2C1.SCL: R401.2 U301.B5 U404.2 | length 11.5
  Layer 1 SIG w0.1: U301.B5@100.4,97.2 100.8,96.8 100.8,94.95 104.25,91.5 104.25,89.05 v1(104.75,88.55)
  Layer 6 SIG w0.1: U404.2@103.787,88.75 103.987,88.55 v1(104.75,88.55)
BARO_I2C1.SDA: R402.2 U301.A5 U404.4 | length 11.2
  Layer 1 SIG w0.1: U301.A5@100.4,96.4 100.4,94.85 102,93.25 102,87.8 v1(102.55,87.25)
  Layer 6 SIG w0.1: v1(102.55,87.25) 103,87.7 U404.4@103,88.213
BOOT0: R301.1 SW301.4 U301.D5 | length 30
  Layer 1 SIG w0.1: U301.D5@100.4,98.8 100,98.4 100,96 100.068,95.932 100.068,94.682 101.5,93.25 101.5,90.5 100.75,89.75 100.75,86.75
  Layer 1 SIG w0.2: 100.75,86.75 102,85.5 102,74.05 R301.1@100.45,72.5 100.45,72.154 101.075,71.529 SW301.4@101.075,71.325
BUCK_BST: C202.1 U201.1 | length 2.3
  Layer 6 SIG w0.4: C202.1@100.45,131 101.545,129.905 U201.1@102.316,129.905
BUCK_COMP: C215.1 R204.1 U201.6 | length 4.4
  Layer 6 SIG w0.2: C215.1@95.5,124.95 96,124.95 ; R204.1@96.5,124.95 96,124.95 ; U201.6@97.684,127.365 97.115,127.365 96,126.25 96,124.95
BUCK_FB: R206.2 R208.1 U201.5 | length 4.6
  Layer 6 SIG w0.2: R206.2@97,123.2 R208.1@98,123.2 98.25,123.45 98.25,126.095 U201.5@97.684,126.095
BUCK_RT: R205.1 U201.4 | length 1
  Layer 6 SIG w0.2: U201.4@102.316,126.095 102.5,125.911 R205.1@102.5,125.2
BUCK_SW: C202.2 D202.1 L201.1 U201.8 | length 1.2
  Layer 6 SIG w0.4: v2(98.5,130.75) 98.75,131 C202.2@99.55,131
  other v2: 96.5,130.75 97.5,130.75 96.5,131.75 97.5,131.75 98.5,131.75
CAN1.RX: U301.B4 U801_CT2.4 | length 7.2
  Layer 1 SIG w0.1: U301.B4@101.2,97.2 101.6,96.8 101.6,95.521 U801_CT2.4@105.391,91.73
CAN1.TX: U301.A4 U801_CT2.1 | length 10.6
  Layer 1 SIG w0.1: U301.A4@101.2,96.4 101.2,95.248 105.523,90.924 105.855,90.924 107.25,92.319 107.25,92.629 U801_CT2.1@106.77,93.109
CAN2.RX: U301.K8 U801_CT1.4 | length 6.1
  Layer 1 SIG w0.1: U801_CT1.4@94.609,108.27 97.878,105.001 97.878,104 97.878,103.722 U301.K8@98,103.6
CAN2.TX: U301.J8 U801_CT1.1 | length 7.2
  Layer 1 SIG w0.1: U801_CT1.1@93.23,106.891 94.871,105.25 96.75,105.25 97.575,104.425 97.575,104 97.575,103.225 U301.J8@98,102.8
CAN_CT1_H: J709.2 R801_CT1.1 R802_CT1.1 U801_CT1.7 | length 8.7
  Layer 1 SIG w0.2: J709.2@88.325,114.375 88.45,114.25 v1(89.8,114.25) 89.8,111.24 U801_CT1.7@91.851,109.189
  Layer 6 SIG w0.3: R802_CT1.1@89.8,113 v1(89.8,114.25)
CAN_CT1_L: J709.3 R803_CT1.2 R804_CT1.2 U801_CT1.6 | length 9.9
  Layer 1 SIG w0.2: J709.3@88.325,115.625 88.45,115.75 v1(89.8,115.75) 90.5,115.05 90.5,111.46 U801_CT1.6@92.311,109.649
  Layer 6 SIG w0.3: v1(89.8,115.75) R804_CT1.2@89.8,117
CAN_CT2_H: J706.2 R801_CT2.1 R802_CT2.1 U801_CT2.7 | length 8.7
  Layer 1 SIG w0.2: U801_CT2.7@108.149,90.811 110.2,88.76 v1(110.2,85.75) 111.55,85.75 J706.2@111.675,85.625
  Layer 6 SIG w0.3: v1(110.2,85.75) R802_CT2.1@110.2,87
CAN_CT2_L: J706.3 R803_CT2.2 R804_CT2.2 U801_CT2.6 | length 9.9
  Layer 1 SIG w0.2: U801_CT2.6@107.689,90.351 109.5,88.54 109.5,84.95 v1(110.2,84.25) 111.55,84.25 J706.3@111.675,84.375
  Layer 6 SIG w0.3: R804_CT2.2@110.2,83 v1(110.2,84.25)